# EAGLE board Qwiic_IMU_Bonobo-Panel (EAGLE 7.7.0), part 1 of 8
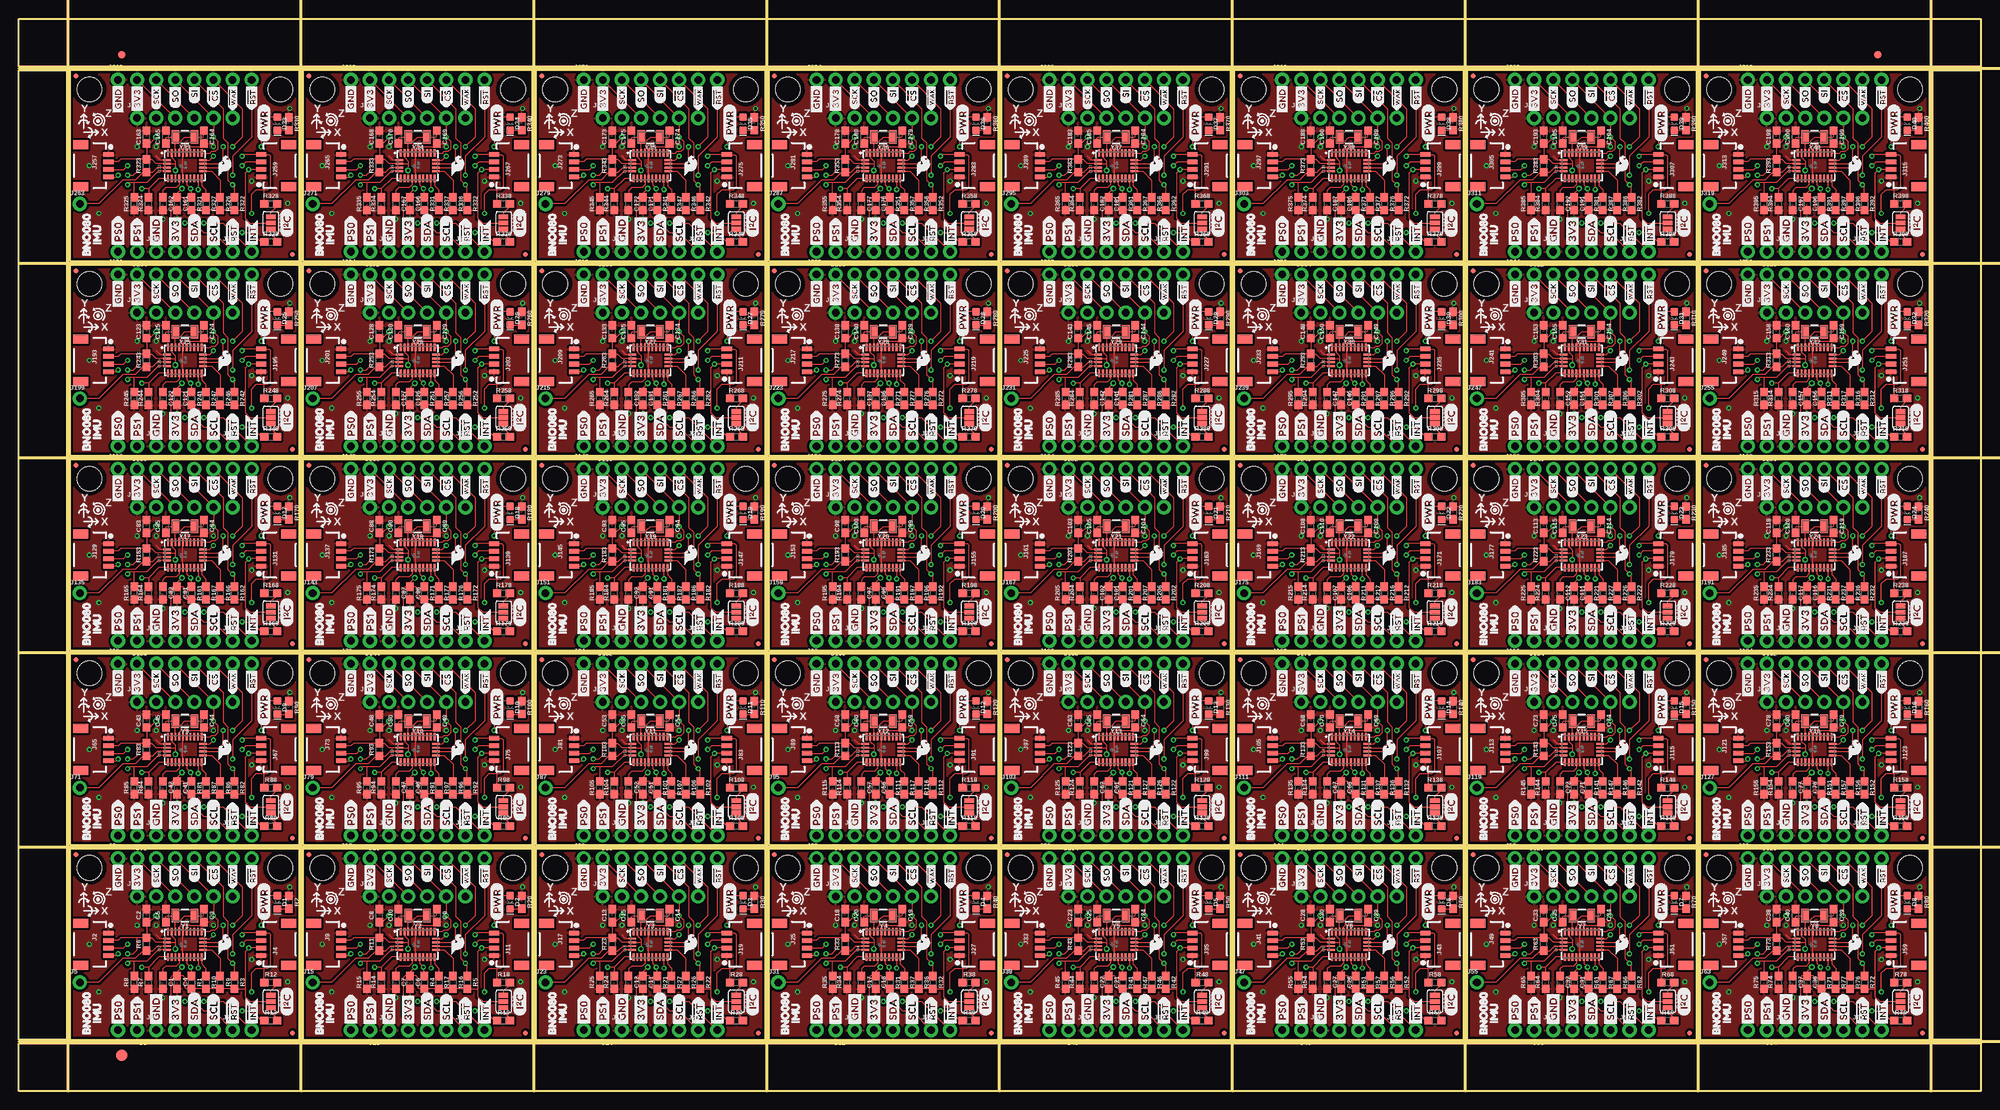
[diagram p0: board, top side]
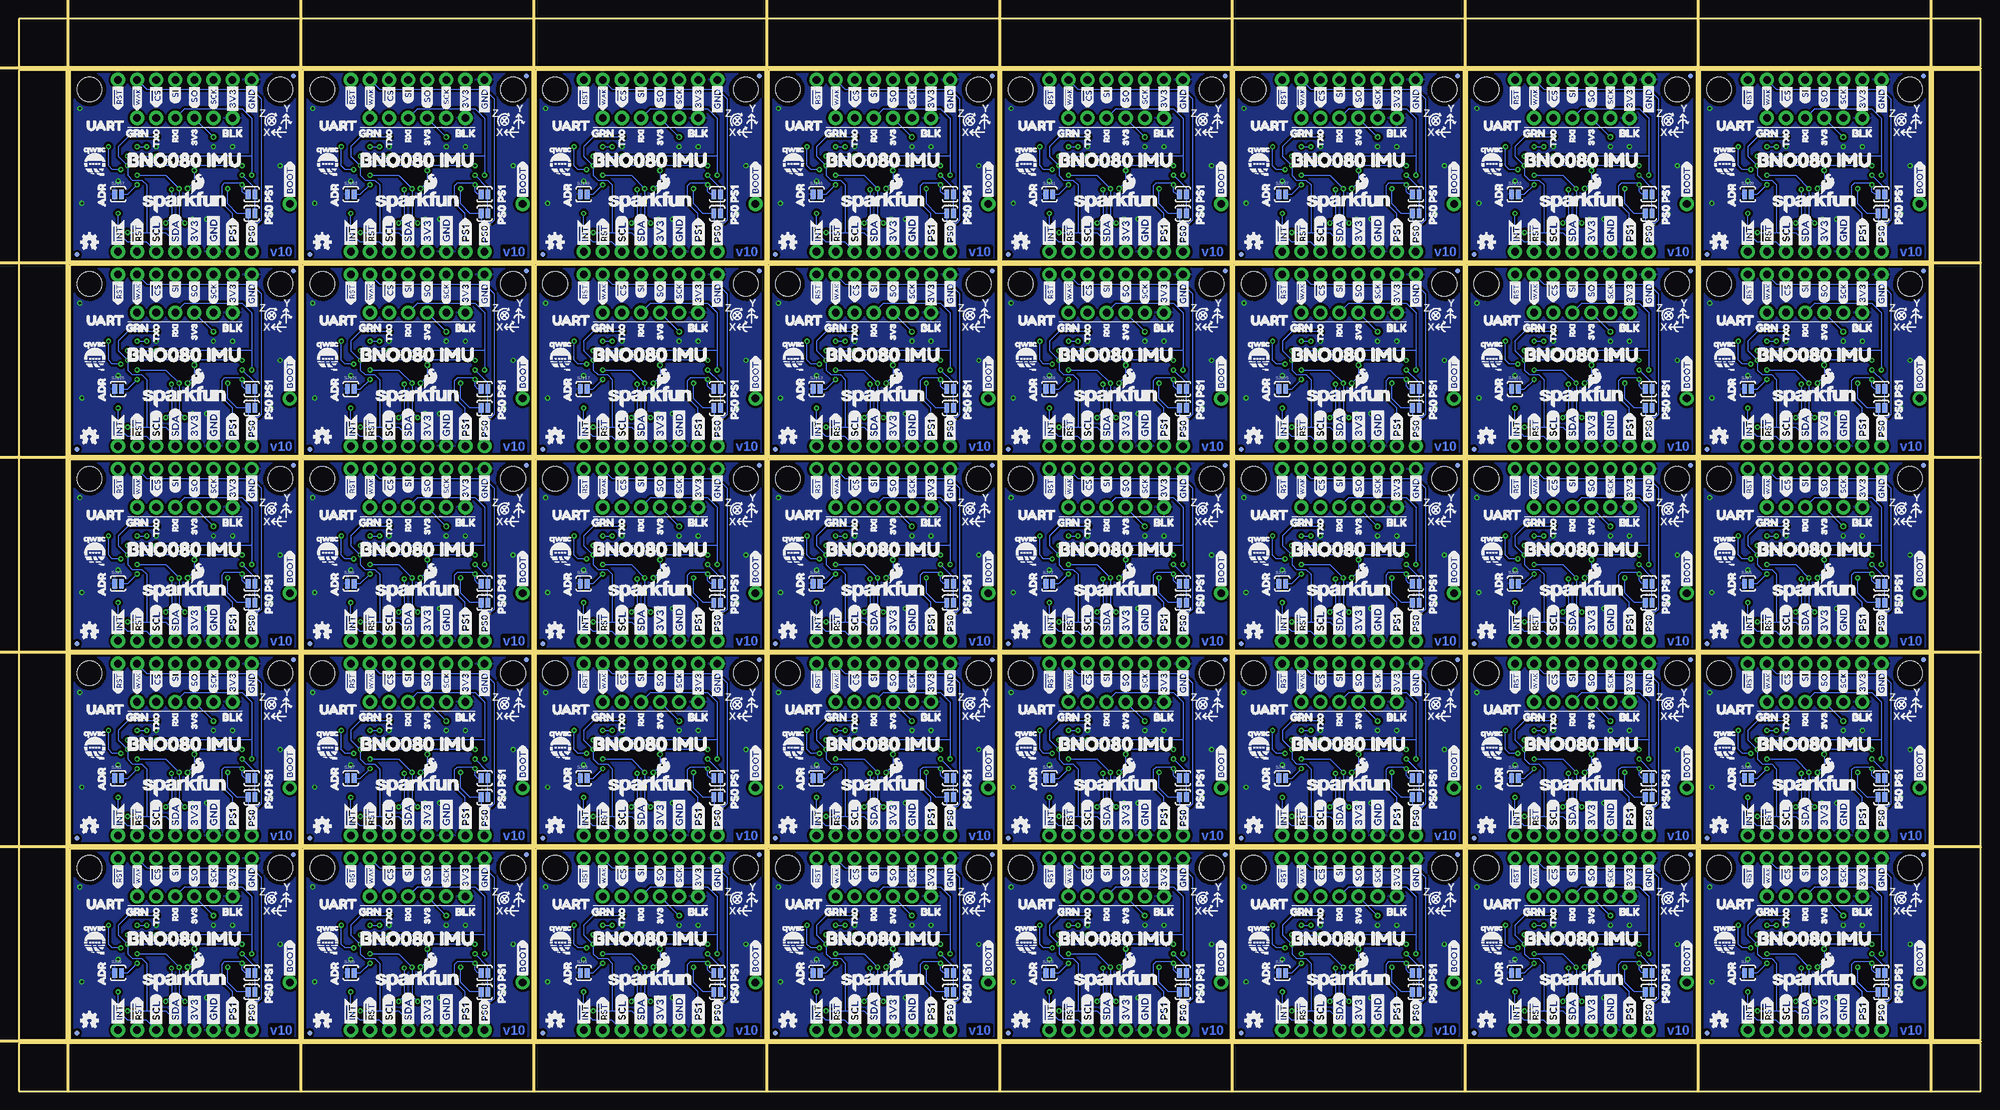
[diagram p1: board, bottom side, seen from below]

Size 261.11 x 142.75 mm. Coordinates in mm from the lower left corner, seen from the top.
Outline: 6.86,6.86 6.86,32.26 37.34,32.26 37.34,6.86 6.86,6.86
Outline: 37.85,6.86 37.85,32.26 68.33,32.26 68.33,6.86 37.85,6.86
Outline: 68.83,6.86 68.83,32.26 99.31,32.26 99.31,6.86 68.83,6.86
Outline: 99.82,6.86 99.82,32.26 130.3,32.26 130.3,6.86 99.82,6.86
Outline: 130.81,6.86 130.81,32.26 161.29,32.26 161.29,6.86 130.81,6.86
Outline: 161.8,6.86 161.8,32.26 192.28,32.26 192.28,6.86 161.8,6.86
Outline: 192.79,6.86 192.79,32.26 223.27,32.26 223.27,6.86 192.79,6.86
Outline: 223.77,6.86 223.77,32.26 254.25,32.26 254.25,6.86 223.77,6.86
Outline: 6.86,32.77 6.86,58.17 37.34,58.17 37.34,32.77 6.86,32.77
Outline: 37.85,32.77 37.85,58.17 68.33,58.17 68.33,32.77 37.85,32.77
Outline: 68.83,32.77 68.83,58.17 99.31,58.17 99.31,32.77 68.83,32.77
Outline: 99.82,32.77 99.82,58.17 130.3,58.17 130.3,32.77 99.82,32.77
Outline: 130.81,32.77 130.81,58.17 161.29,58.17 161.29,32.77 130.81,32.77
Outline: 161.8,32.77 161.8,58.17 192.28,58.17 192.28,32.77 161.8,32.77
Outline: 192.79,32.77 192.79,58.17 223.27,58.17 223.27,32.77 192.79,32.77
Outline: 223.77,32.77 223.77,58.17 254.25,58.17 254.25,32.77 223.77,32.77
Outline: 6.86,58.67 6.86,84.07 37.34,84.07 37.34,58.67 6.86,58.67
Outline: 37.85,58.67 37.85,84.07 68.33,84.07 68.33,58.67 37.85,58.67
Outline: 68.83,58.67 68.83,84.07 99.31,84.07 99.31,58.67 68.83,58.67
Outline: 99.82,58.67 99.82,84.07 130.3,84.07 130.3,58.67 99.82,58.67
Outline: 130.81,58.67 130.81,84.07 161.29,84.07 161.29,58.67 130.81,58.67
Outline: 161.8,58.67 161.8,84.07 192.28,84.07 192.28,58.67 161.8,58.67
Outline: 192.79,58.67 192.79,84.07 223.27,84.07 223.27,58.67 192.79,58.67
Outline: 223.77,58.67 223.77,84.07 254.25,84.07 254.25,58.67 223.77,58.67
Outline: 6.86,84.58 6.86,109.98 37.34,109.98 37.34,84.58 6.86,84.58
Outline: 37.85,84.58 37.85,109.98 68.33,109.98 68.33,84.58 37.85,84.58
Outline: 68.83,84.58 68.83,109.98 99.31,109.98 99.31,84.58 68.83,84.58
Outline: 99.82,84.58 99.82,109.98 130.3,109.98 130.3,84.58 99.82,84.58
Outline: 130.81,84.58 130.81,109.98 161.29,109.98 161.29,84.58 130.81,84.58
Outline: 161.8,84.58 161.8,109.98 192.28,109.98 192.28,84.58 161.8,84.58
Outline: 192.79,84.58 192.79,109.98 223.27,109.98 223.27,84.58 192.79,84.58
Outline: 223.77,84.58 223.77,109.98 254.25,109.98 254.25,84.58 223.77,84.58
Outline: 6.86,110.49 6.86,135.89 37.34,135.89 37.34,110.49 6.86,110.49
Outline: 37.85,110.49 37.85,135.89 68.33,135.89 68.33,110.49 37.85,110.49
Outline: 68.83,110.49 68.83,135.89 99.31,135.89 99.31,110.49 68.83,110.49
Outline: 99.82,110.49 99.82,135.89 130.3,135.89 130.3,110.49 99.82,110.49
Outline: 130.81,110.49 130.81,135.89 161.29,135.89 161.29,110.49 130.81,110.49
Outline: 161.8,110.49 161.8,135.89 192.28,135.89 192.28,110.49 161.8,110.49
Outline: 192.79,110.49 192.79,135.89 223.27,135.89 223.27,110.49 192.79,110.49
Outline: 223.77,110.49 223.77,135.89 254.25,135.89 254.25,110.49 223.77,110.49
Outline: 0,6.35 261.11,6.35 261.11,0 0,0 0,6.35
Outline: 254.76,135.89 261.11,135.89 261.11,6.86 254.76,6.86 254.76,135.89
Outline: 0,142.75 261.11,142.75 261.11,136.4 0,136.4 0,142.75
Outline: 0,135.89 6.35,135.89 6.35,6.86 0,6.86 0,135.89
Copper layers (1*16): Top 0.035mm / dielectric 1.5mm / Bottom 0.035mm
Design rules "SparkFun-2-layer-PCBWay-LIMIT": minimum track width 6mil, minimum drill 0.3mm, track to track 6mil, track to pad 6mil, pad to pad 6mil, via to via 6mil, smd to smd 6mil, copper to edge 6mil, drill to drill 6mil, minimum pad ring 7mil, minimum via ring 7mil, stop-mask expansion 4mil, vias tented up to drill 25mil, thermal gap 10mil
Milling: 15 lines

## Footprints (pad centres in the part's own frame; a part is rotated, then mirrored left to right if it is on the bottom)
0603 = smd 1.1 x 1: 1 -0.85,0; 2 0.85,0
LED-0603 = smd 1 x 1: A -0.877,0; C 0.877,0
FIDUCIAL-1X2 = smd 1 x 1: 1 0,0
FIDUCIAL-1.5X3 = smd 1.5 x 1.5: 1 0,0
1X06_NO_SILK = drill 1.016 pad 1.88: 1 0,0; 2 2.54,0; 3 5.08,0; 4 7.62,0; 5 10.16,0; 6 12.7,0
1X04_1MM_RA = smd 0.6 x 1.35: 1 -1.5,0; 2 -0.5,0; 3 0.5,0; 4 1.5,0 | smd 1.2 x 2: NC1 2.8,-3.675; NC2 -2.8,-3.675
1X04_NO_SILK = drill 1.016 pad 1.88: 1 0,0; 2 2.54,0; 3 5.08,0; 4 7.62,0
1X01_NO_SILK = drill 1.016 pad 1.88: 1 0,0
1X08_NO_SILK = drill 1.016 pad 1.88: 1 0,0; 2 2.54,0; 3 5.08,0; 4 7.62,0; 5 10.16,0; 6 12.7,0; 7 15.24,0; 8 17.78,0
1X02_NO_SILK = drill 1.016 pad 1.88: 1 0,0; 2 2.54,0
MICRO-FIDUCIAL = smd 0.635 x 0.635: 1 0,0
STAND-OFF = hole 3.302: 0,0
SMT-JUMPER_3_2-NC_PASTE_SILK = smd 0.635 x 1.27: 1 -0.813,0; 2 0,0; 3 0.813,0
SJ_2S-NO = smd 0.635 x 1.27: 1 -0.45,0; 2 0.45,0
LGA-28 = smd 1 x 0.25: 1 1.7,2.25; 6 -1.7,2.25; 7 -1.7,1.75; 8 -1.7,1.25; 9 -1.7,0.75; 10 -1.7,0.25; 11 -1.7,-0.25; 12 -1.7,-0.75; 13 -1.7,-1.25; 14 -1.7,-1.75; 15 -1.7,-2.25; 20 1.7,-2.25; 21 1.7,-1.75; 22 1.7,-1.25; 23 1.7,-0.75; 24 1.7,-0.25; 25 1.7,0.25; 26 1.7,0.75; 27 1.7,1.25; 28 1.7,1.75 | smd 0.25 x 1: 2 0.75,2.4; 3 0.25,2.4; 4 -0.25,2.4; 5 -0.75,2.4; 16 -0.75,-2.4; 17 -0.25,-2.4; 18 0.25,-2.4; 19 0.75,-2.4
CRYSTAL-SMD-3.2X1.5MM = smd 1 x 1.8: P$1 -1.25,0; P$2 1.25,0

## Placement (x,y rotation side)
C1  0.1uF  [0603]  19.18,14.48 270 top
C2  0.1uF  [0603]  17.02,23.37 90 top
C3  22pF  [0603]  24.64,23.37 270 top
C4  0.1uF  [0603]  21.08,14.48 270 top
C5  22pF  [0603]  19.56,23.37 90 top
C6  0.1uF  [0603]  52.07,14.48 270 top
C7  0.1uF  [0603]  50.16,14.48 270 top
C8  0.1uF  [0603]  48.01,23.37 90 top
C9  22pF  [0603]  55.63,23.37 270 top
C10  22pF  [0603]  50.55,23.37 90 top
C11  0.1uF  [0603]  83.06,14.48 270 top
C12  0.1uF  [0603]  81.15,14.48 270 top
C13  0.1uF  [0603]  78.99,23.37 90 top
C14  22pF  [0603]  86.61,23.37 270 top
C15  22pF  [0603]  81.53,23.37 90 top
C16  0.1uF  [0603]  114.05,14.48 270 top
C17  0.1uF  [0603]  112.14,14.48 270 top
C18  0.1uF  [0603]  109.98,23.37 90 top
C19  22pF  [0603]  117.6,23.37 270 top
C20  22pF  [0603]  112.52,23.37 90 top
C21  0.1uF  [0603]  145.03,14.48 270 top
C22  0.1uF  [0603]  143.13,14.48 270 top
C23  0.1uF  [0603]  140.97,23.37 90 top
C24  22pF  [0603]  148.59,23.37 270 top
C25  22pF  [0603]  143.51,23.37 90 top
C26  0.1uF  [0603]  176.02,14.48 270 top
C27  0.1uF  [0603]  174.12,14.48 270 top
C28  0.1uF  [0603]  171.96,23.37 90 top
C29  22pF  [0603]  179.58,23.37 270 top
C30  22pF  [0603]  174.5,23.37 90 top
C31  0.1uF  [0603]  207.01,14.48 270 top
C32  0.1uF  [0603]  205.11,14.48 270 top
C33  0.1uF  [0603]  202.95,23.37 90 top
C34  22pF  [0603]  210.57,23.37 270 top
C35  22pF  [0603]  205.49,23.37 90 top
C36  0.1uF  [0603]  238,14.48 270 top
C37  0.1uF  [0603]  236.09,14.48 270 top
C38  0.1uF  [0603]  233.93,23.37 90 top
C39  22pF  [0603]  241.55,23.37 270 top
C40  22pF  [0603]  236.47,23.37 90 top
C41  0.1uF  [0603]  21.08,40.39 270 top
C42  0.1uF  [0603]  19.18,40.39 270 top
C43  0.1uF  [0603]  17.02,49.28 90 top
C44  22pF  [0603]  24.64,49.28 270 top
C45  22pF  [0603]  19.56,49.28 90 top
C46  0.1uF  [0603]  52.07,40.39 270 top
C47  0.1uF  [0603]  50.16,40.39 270 top
C48  0.1uF  [0603]  48.01,49.28 90 top
C49  22pF  [0603]  55.63,49.28 270 top
C50  22pF  [0603]  50.55,49.28 90 top
C51  0.1uF  [0603]  83.06,40.39 270 top
C52  0.1uF  [0603]  81.15,40.39 270 top
C53  0.1uF  [0603]  78.99,49.28 90 top
C54  22pF  [0603]  86.61,49.28 270 top
C55  22pF  [0603]  81.53,49.28 90 top
C56  0.1uF  [0603]  114.05,40.39 270 top
C57  0.1uF  [0603]  112.14,40.39 270 top
C58  0.1uF  [0603]  109.98,49.28 90 top
C59  22pF  [0603]  117.6,49.28 270 top
C60  22pF  [0603]  112.52,49.28 90 top
C61  0.1uF  [0603]  145.03,40.39 270 top
C62  0.1uF  [0603]  143.13,40.39 270 top
C63  0.1uF  [0603]  140.97,49.28 90 top
C64  22pF  [0603]  148.59,49.28 270 top
C65  22pF  [0603]  143.51,49.28 90 top
C66  0.1uF  [0603]  176.02,40.39 270 top
C67  0.1uF  [0603]  174.12,40.39 270 top
C68  0.1uF  [0603]  171.96,49.28 90 top
C69  22pF  [0603]  179.58,49.28 270 top
C70  22pF  [0603]  174.5,49.28 90 top
C71  0.1uF  [0603]  207.01,40.39 270 top
C72  0.1uF  [0603]  205.11,40.39 270 top
C73  0.1uF  [0603]  202.95,49.28 90 top
C74  22pF  [0603]  210.57,49.28 270 top
C75  22pF  [0603]  205.49,49.28 90 top
C76  0.1uF  [0603]  238,40.39 270 top
C77  0.1uF  [0603]  236.09,40.39 270 top
C78  0.1uF  [0603]  233.93,49.28 90 top
C79  22pF  [0603]  241.55,49.28 270 top
C80  22pF  [0603]  236.47,49.28 90 top
C81  0.1uF  [0603]  21.08,66.29 270 top
C82  0.1uF  [0603]  19.18,66.29 270 top
C83  0.1uF  [0603]  17.02,75.18 90 top
C84  22pF  [0603]  24.64,75.18 270 top
C85  22pF  [0603]  19.56,75.18 90 top
C86  0.1uF  [0603]  52.07,66.29 270 top
C87  0.1uF  [0603]  50.16,66.29 270 top
C88  0.1uF  [0603]  48.01,75.18 90 top
C89  22pF  [0603]  55.63,75.18 270 top
C90  22pF  [0603]  50.55,75.18 90 top
C91  0.1uF  [0603]  83.06,66.29 270 top
C92  0.1uF  [0603]  81.15,66.29 270 top
C93  0.1uF  [0603]  78.99,75.18 90 top
C94  22pF  [0603]  86.61,75.18 270 top
C95  22pF  [0603]  81.53,75.18 90 top
C96  0.1uF  [0603]  114.05,66.29 270 top
C97  0.1uF  [0603]  112.14,66.29 270 top
C98  0.1uF  [0603]  109.98,75.18 90 top
C99  22pF  [0603]  117.6,75.18 270 top
C100  22pF  [0603]  112.52,75.18 90 top
C101  0.1uF  [0603]  145.03,66.29 270 top
C102  0.1uF  [0603]  143.13,66.29 270 top
C103  0.1uF  [0603]  140.97,75.18 90 top
C104  22pF  [0603]  148.59,75.18 270 top
C105  22pF  [0603]  143.51,75.18 90 top
C106  0.1uF  [0603]  176.02,66.29 270 top
C107  0.1uF  [0603]  174.12,66.29 270 top
C108  0.1uF  [0603]  171.96,75.18 90 top
C109  22pF  [0603]  179.58,75.18 270 top
C110  22pF  [0603]  174.5,75.18 90 top
C111  0.1uF  [0603]  207.01,66.29 270 top
C112  0.1uF  [0603]  205.11,66.29 270 top
C113  0.1uF  [0603]  202.95,75.18 90 top
C114  22pF  [0603]  210.57,75.18 270 top
C115  22pF  [0603]  205.49,75.18 90 top
C116  0.1uF  [0603]  238,66.29 270 top
C117  0.1uF  [0603]  236.09,66.29 270 top
C118  0.1uF  [0603]  233.93,75.18 90 top
C119  22pF  [0603]  241.55,75.18 270 top
C120  22pF  [0603]  236.47,75.18 90 top
C121  0.1uF  [0603]  21.08,92.2 270 top
C122  0.1uF  [0603]  19.18,92.2 270 top
C123  0.1uF  [0603]  17.02,101.09 90 top
C124  22pF  [0603]  24.64,101.09 270 top
C125  22pF  [0603]  19.56,101.09 90 top
C126  0.1uF  [0603]  52.07,92.2 270 top
C127  0.1uF  [0603]  50.16,92.2 270 top
C128  0.1uF  [0603]  48.01,101.09 90 top
C129  22pF  [0603]  55.63,101.09 270 top
C130  22pF  [0603]  50.55,101.09 90 top
C131  0.1uF  [0603]  83.06,92.2 270 top
C132  0.1uF  [0603]  81.15,92.2 270 top
C133  0.1uF  [0603]  78.99,101.09 90 top
C134  22pF  [0603]  86.61,101.09 270 top
C135  22pF  [0603]  81.53,101.09 90 top
C136  0.1uF  [0603]  114.05,92.2 270 top
C137  0.1uF  [0603]  112.14,92.2 270 top
C138  0.1uF  [0603]  109.98,101.09 90 top
C139  22pF  [0603]  117.6,101.09 270 top
C140  22pF  [0603]  112.52,101.09 90 top
C141  0.1uF  [0603]  145.03,92.2 270 top
C142  0.1uF  [0603]  143.13,92.2 270 top
C143  0.1uF  [0603]  140.97,101.09 90 top
C144  22pF  [0603]  148.59,101.09 270 top
C145  22pF  [0603]  143.51,101.09 90 top
C146  0.1uF  [0603]  176.02,92.2 270 top
C147  0.1uF  [0603]  174.12,92.2 270 top
C148  0.1uF  [0603]  171.96,101.09 90 top
C149  22pF  [0603]  179.58,101.09 270 top
C150  22pF  [0603]  174.5,101.09 90 top
C151  0.1uF  [0603]  207.01,92.2 270 top
C152  0.1uF  [0603]  205.11,92.2 270 top
C153  0.1uF  [0603]  202.95,101.09 90 top
C154  22pF  [0603]  210.57,101.09 270 top
C155  22pF  [0603]  205.49,101.09 90 top
C156  0.1uF  [0603]  238,92.2 270 top
C157  0.1uF  [0603]  236.09,92.2 270 top
C158  0.1uF  [0603]  233.93,101.09 90 top
C159  22pF  [0603]  241.55,101.09 270 top
C160  22pF  [0603]  236.47,101.09 90 top
C161  0.1uF  [0603]  21.08,118.11 270 top
C162  0.1uF  [0603]  19.18,118.11 270 top
C163  0.1uF  [0603]  17.02,127 90 top
C164  22pF  [0603]  24.64,127 270 top
C165  22pF  [0603]  19.56,127 90 top
C166  0.1uF  [0603]  52.07,118.11 270 top
C167  0.1uF  [0603]  50.16,118.11 270 top
C168  0.1uF  [0603]  48.01,127 90 top
C169  22pF  [0603]  55.63,127 270 top
C170  22pF  [0603]  50.55,127 90 top
C171  0.1uF  [0603]  83.06,118.11 270 top
C172  0.1uF  [0603]  81.15,118.11 270 top
C173  0.1uF  [0603]  78.99,127 90 top
C174  22pF  [0603]  86.61,127 270 top
C175  22pF  [0603]  81.53,127 90 top
C176  0.1uF  [0603]  114.05,118.11 270 top
C177  0.1uF  [0603]  112.14,118.11 270 top
C178  0.1uF  [0603]  109.98,127 90 top
C179  22pF  [0603]  117.6,127 270 top
C180  22pF  [0603]  112.52,127 90 top
C181  0.1uF  [0603]  145.03,118.11 270 top
C182  0.1uF  [0603]  143.13,118.11 270 top
C183  0.1uF  [0603]  140.97,127 90 top
C184  22pF  [0603]  148.59,127 270 top
C185  22pF  [0603]  143.51,127 90 top
C186  0.1uF  [0603]  176.02,118.11 270 top
C187  0.1uF  [0603]  174.12,118.11 270 top
C188  0.1uF  [0603]  171.96,127 90 top
C189  22pF  [0603]  179.58,127 270 top
C190  22pF  [0603]  174.5,127 90 top
C191  0.1uF  [0603]  207.01,118.11 270 top
C192  0.1uF  [0603]  205.11,118.11 270 top
C193  0.1uF  [0603]  202.95,127 90 top
C194  22pF  [0603]  210.57,127 270 top
C195  22pF  [0603]  205.49,127 90 top
C196  0.1uF  [0603]  238,118.11 270 top
C197  0.1uF  [0603]  236.09,118.11 270 top
C198  0.1uF  [0603]  233.93,127 90 top
C199  22pF  [0603]  241.55,127 270 top
C200  22pF  [0603]  236.47,127 90 top
D1  RED  [LED-0603]  34.42,25.15 270 top
D2  RED  [LED-0603]  65.41,25.15 270 top
D3  RED  [LED-0603]  96.39,25.15 270 top
D4  RED  [LED-0603]  127.38,25.15 270 top
D5  RED  [LED-0603]  158.37,25.15 270 top
D6  RED  [LED-0603]  189.36,25.15 270 top
D7  RED  [LED-0603]  220.34,25.15 270 top
D8  RED  [LED-0603]  251.33,25.15 270 top
D9  RED  [LED-0603]  34.42,51.05 270 top
D10  RED  [LED-0603]  65.41,51.05 270 top
D11  RED  [LED-0603]  96.39,51.05 270 top
D12  RED  [LED-0603]  127.38,51.05 270 top
D13  RED  [LED-0603]  158.37,51.05 270 top
D14  RED  [LED-0603]  189.36,51.05 270 top
D15  RED  [LED-0603]  220.34,51.05 270 top
D16  RED  [LED-0603]  251.33,51.05 270 top
D17  RED  [LED-0603]  34.42,76.96 270 top
D18  RED  [LED-0603]  65.41,76.96 270 top
D19  RED  [LED-0603]  96.39,76.96 270 top
D20  RED  [LED-0603]  127.38,76.96 270 top
D21  RED  [LED-0603]  158.37,76.96 270 top
D22  RED  [LED-0603]  189.36,76.96 270 top
D23  RED  [LED-0603]  220.34,76.96 270 top
D24  RED  [LED-0603]  251.33,76.96 270 top
D25  RED  [LED-0603]  34.42,102.87 270 top
D26  RED  [LED-0603]  65.41,102.87 270 top
D27  RED  [LED-0603]  96.39,102.87 270 top
D28  RED  [LED-0603]  127.38,102.87 270 top
D29  RED  [LED-0603]  158.37,102.87 270 top
D30  RED  [LED-0603]  189.36,102.87 270 top
D31  RED  [LED-0603]  220.34,102.87 270 top
D32  RED  [LED-0603]  251.33,102.87 270 top
D33  RED  [LED-0603]  34.42,128.78 270 top
D34  RED  [LED-0603]  65.41,128.78 270 top
D35  RED  [LED-0603]  96.39,128.78 270 top
D36  RED  [LED-0603]  127.38,128.78 270 top
D37  RED  [LED-0603]  158.37,128.78 270 top
D38  RED  [LED-0603]  189.36,128.78 270 top
D39  RED  [LED-0603]  220.34,128.78 270 top
D40  RED  [LED-0603]  251.33,128.78 270 top
E$1  [FIDUCIAL-1X2]  13.72,137.99 0 top
E$2  [FIDUCIAL-1X2]  247.4,137.99 0 top
E$3  [FIDUCIAL-1.5X3]  13.72,4.76 0 top
J1  [1X06_NO_SILK]  15.75,25.91 0 top
J2  SMD  [1X04_1MM_RA]  11.94,19.56 270 top
J3  PTH  [1X04_NO_SILK]  18.29,8.13 0 top
J4  SMD  [1X04_1MM_RA]  32.26,19.56 90 top
J5  [1X01_NO_SILK]  8.13,14.48 0 top
J6  SPI  [1X08_NO_SILK]  13.21,30.99 0 top
J7  [1X02_NO_SILK]  28.45,8.13 0 top
J8  [1X02_NO_SILK]  15.75,8.13 180 top
J9  SMD  [1X04_1MM_RA]  42.93,19.56 270 top
J10  PTH  [1X04_NO_SILK]  49.28,8.13 0 top
J11  SMD  [1X04_1MM_RA]  63.25,19.56 90 top
J12  SPI  [1X08_NO_SILK]  44.2,30.99 0 top
J13  [1X02_NO_SILK]  59.44,8.13 0 top
J14  [1X06_NO_SILK]  46.74,25.91 0 top
J15  [1X01_NO_SILK]  39.12,14.48 0 top
J16  [1X02_NO_SILK]  46.74,8.13 180 top
J17  SMD  [1X04_1MM_RA]  73.91,19.56 270 top
J18  PTH  [1X04_NO_SILK]  80.26,8.13 0 top
J19  SMD  [1X04_1MM_RA]  94.23,19.56 90 top
J20  SPI  [1X08_NO_SILK]  75.18,30.99 0 top
J21  [1X02_NO_SILK]  90.42,8.13 0 top
J22  [1X06_NO_SILK]  77.72,25.91 0 top
J23  [1X01_NO_SILK]  70.1,14.48 0 top
J24  [1X02_NO_SILK]  77.72,8.13 180 top
J25  SMD  [1X04_1MM_RA]  104.9,19.56 270 top
J26  PTH  [1X04_NO_SILK]  111.25,8.13 0 top
J27  SMD  [1X04_1MM_RA]  125.22,19.56 90 top
J28  SPI  [1X08_NO_SILK]  106.17,30.99 0 top
J29  [1X02_NO_SILK]  121.41,8.13 0 top
J30  [1X06_NO_SILK]  108.71,25.91 0 top
J31  [1X01_NO_SILK]  101.09,14.48 0 top
J32  [1X02_NO_SILK]  108.71,8.13 180 top
J33  SMD  [1X04_1MM_RA]  135.89,19.56 270 top
J34  PTH  [1X04_NO_SILK]  142.24,8.13 0 top
J35  SMD  [1X04_1MM_RA]  156.21,19.56 90 top
J36  SPI  [1X08_NO_SILK]  137.16,30.99 0 top
J37  [1X02_NO_SILK]  152.4,8.13 0 top
J38  [1X06_NO_SILK]  139.7,25.91 0 top
J39  [1X01_NO_SILK]  132.08,14.48 0 top
J40  [1X02_NO_SILK]  139.7,8.13 180 top
J41  SMD  [1X04_1MM_RA]  166.88,19.56 270 top
J42  PTH  [1X04_NO_SILK]  173.23,8.13 0 top
J43  SMD  [1X04_1MM_RA]  187.2,19.56 90 top
J44  SPI  [1X08_NO_SILK]  168.15,30.99 0 top
J45  [1X02_NO_SILK]  183.39,8.13 0 top
J46  [1X06_NO_SILK]  170.69,25.91 0 top
J47  [1X01_NO_SILK]  163.07,14.48 0 top
J48  [1X02_NO_SILK]  170.69,8.13 180 top
J49  SMD  [1X04_1MM_RA]  197.87,19.56 270 top
J50  PTH  [1X04_NO_SILK]  204.22,8.13 0 top
J51  SMD  [1X04_1MM_RA]  218.19,19.56 90 top
J52  SPI  [1X08_NO_SILK]  199.14,30.99 0 top
J53  [1X02_NO_SILK]  214.38,8.13 0 top
J54  [1X06_NO_SILK]  201.68,25.91 0 top
J55  [1X01_NO_SILK]  194.06,14.48 0 top
J56  [1X02_NO_SILK]  201.68,8.13 180 top
J57  SMD  [1X04_1MM_RA]  228.85,19.56 270 top
J58  PTH  [1X04_NO_SILK]  235.2,8.13 0 top
J59  SMD  [1X04_1MM_RA]  249.17,19.56 90 top
J60  SPI  [1X08_NO_SILK]  230.12,30.99 0 top
J61  [1X02_NO_SILK]  245.36,8.13 0 top
J62  [1X06_NO_SILK]  232.66,25.91 0 top
J63  [1X01_NO_SILK]  225.04,14.48 0 top
J64  [1X02_NO_SILK]  232.66,8.13 180 top
J65  SMD  [1X04_1MM_RA]  11.94,45.47 270 top
J66  PTH  [1X04_NO_SILK]  18.29,34.04 0 top
J67  SMD  [1X04_1MM_RA]  32.26,45.47 90 top
J68  SPI  [1X08_NO_SILK]  13.21,56.9 0 top
J69  [1X02_NO_SILK]  28.45,34.04 0 top
J70  [1X06_NO_SILK]  15.75,51.82 0 top
J71  [1X01_NO_SILK]  8.13,40.39 0 top
J72  [1X02_NO_SILK]  15.75,34.04 180 top
J73  SMD  [1X04_1MM_RA]  42.93,45.47 270 top
J74  PTH  [1X04_NO_SILK]  49.28,34.04 0 top
J75  SMD  [1X04_1MM_RA]  63.25,45.47 90 top
J76  SPI  [1X08_NO_SILK]  44.2,56.9 0 top
J77  [1X02_NO_SILK]  59.44,34.04 0 top
J78  [1X06_NO_SILK]  46.74,51.82 0 top
J79  [1X01_NO_SILK]  39.12,40.39 0 top
J80  [1X02_NO_SILK]  46.74,34.04 180 top
J81  SMD  [1X04_1MM_RA]  73.91,45.47 270 top
J82  PTH  [1X04_NO_SILK]  80.26,34.04 0 top
J83  SMD  [1X04_1MM_RA]  94.23,45.47 90 top
J84  SPI  [1X08_NO_SILK]  75.18,56.9 0 top
J85  [1X02_NO_SILK]  90.42,34.04 0 top
J86  [1X06_NO_SILK]  77.72,51.82 0 top
J87  [1X01_NO_SILK]  70.1,40.39 0 top
J88  [1X02_NO_SILK]  77.72,34.04 180 top
J89  SMD  [1X04_1MM_RA]  104.9,45.47 270 top
J90  PTH  [1X04_NO_SILK]  111.25,34.04 0 top
J91  SMD  [1X04_1MM_RA]  125.22,45.47 90 top
J92  SPI  [1X08_NO_SILK]  106.17,56.9 0 top
J93  [1X02_NO_SILK]  121.41,34.04 0 top
J94  [1X06_NO_SILK]  108.71,51.82 0 top
J95  [1X01_NO_SILK]  101.09,40.39 0 top
J96  [1X02_NO_SILK]  108.71,34.04 180 top
J97  SMD  [1X04_1MM_RA]  135.89,45.47 270 top
J98  PTH  [1X04_NO_SILK]  142.24,34.04 0 top
J99  SMD  [1X04_1MM_RA]  156.21,45.47 90 top
J100  SPI  [1X08_NO_SILK]  137.16,56.9 0 top
J101  [1X02_NO_SILK]  152.4,34.04 0 top
J102  [1X06_NO_SILK]  139.7,51.82 0 top
J103  [1X01_NO_SILK]  132.08,40.39 0 top
J104  [1X02_NO_SILK]  139.7,34.04 180 top
J105  SMD  [1X04_1MM_RA]  166.88,45.47 270 top
J106  PTH  [1X04_NO_SILK]  173.23,34.04 0 top
J107  SMD  [1X04_1MM_RA]  187.2,45.47 90 top
J108  SPI  [1X08_NO_SILK]  168.15,56.9 0 top
J109  [1X02_NO_SILK]  183.39,34.04 0 top
J110  [1X06_NO_SILK]  170.69,51.82 0 top
J111  [1X01_NO_SILK]  163.07,40.39 0 top
J112  [1X02_NO_SILK]  170.69,34.04 180 top
J113  SMD  [1X04_1MM_RA]  197.87,45.47 270 top
J114  PTH  [1X04_NO_SILK]  204.22,34.04 0 top
J115  SMD  [1X04_1MM_RA]  218.19,45.47 90 top
J116  SPI  [1X08_NO_SILK]  199.14,56.9 0 top
J117  [1X02_NO_SILK]  214.38,34.04 0 top
J118  [1X06_NO_SILK]  201.68,51.82 0 top
J119  [1X01_NO_SILK]  194.06,40.39 0 top
J120  [1X02_NO_SILK]  201.68,34.04 180 top
J121  SMD  [1X04_1MM_RA]  228.85,45.47 270 top
J122  PTH  [1X04_NO_SILK]  235.2,34.04 0 top
J123  SMD  [1X04_1MM_RA]  249.17,45.47 90 top
J124  SPI  [1X08_NO_SILK]  230.12,56.9 0 top
J125  [1X02_NO_SILK]  245.36,34.04 0 top
J126  [1X06_NO_SILK]  232.66,51.82 0 top
J127  [1X01_NO_SILK]  225.04,40.39 0 top
J128  [1X02_NO_SILK]  232.66,34.04 180 top
J129  SMD  [1X04_1MM_RA]  11.94,71.37 270 top
J130  PTH  [1X04_NO_SILK]  18.29,59.94 0 top
J131  SMD  [1X04_1MM_RA]  32.26,71.37 90 top
J132  SPI  [1X08_NO_SILK]  13.21,82.8 0 top
J133  [1X02_NO_SILK]  28.45,59.94 0 top
J134  [1X06_NO_SILK]  15.75,77.72 0 top
J135  [1X01_NO_SILK]  8.13,66.29 0 top
J136  [1X02_NO_SILK]  15.75,59.94 180 top
J137  SMD  [1X04_1MM_RA]  42.93,71.37 270 top
J138  PTH  [1X04_NO_SILK]  49.28,59.94 0 top
J139  SMD  [1X04_1MM_RA]  63.25,71.37 90 top
J140  SPI  [1X08_NO_SILK]  44.2,82.8 0 top
J141  [1X02_NO_SILK]  59.44,59.94 0 top
J142  [1X06_NO_SILK]  46.74,77.72 0 top
J143  [1X01_NO_SILK]  39.12,66.29 0 top
J144  [1X02_NO_SILK]  46.74,59.94 180 top
J145  SMD  [1X04_1MM_RA]  73.91,71.37 270 top
J146  PTH  [1X04_NO_SILK]  80.26,59.94 0 top
J147  SMD  [1X04_1MM_RA]  94.23,71.37 90 top
J148  SPI  [1X08_NO_SILK]  75.18,82.8 0 top
J149  [1X02_NO_SILK]  90.42,59.94 0 top
J150  [1X06_NO_SILK]  77.72,77.72 0 top
J151  [1X01_NO_SILK]  70.1,66.29 0 top
J152  [1X02_NO_SILK]  77.72,59.94 180 top
J153  SMD  [1X04_1MM_RA]  104.9,71.37 270 top
J154  PTH  [1X04_NO_SILK]  111.25,59.94 0 top
J155  SMD  [1X04_1MM_RA]  125.22,71.37 90 top
J156  SPI  [1X08_NO_SILK]  106.17,82.8 0 top
J157  [1X02_NO_SILK]  121.41,59.94 0 top
J158  [1X06_NO_SILK]  108.71,77.72 0 top
J159  [1X01_NO_SILK]  101.09,66.29 0 top
J160  [1X02_NO_SILK]  108.71,59.94 180 top
J161  SMD  [1X04_1MM_RA]  135.89,71.37 270 top
J162  PTH  [1X04_NO_SILK]  142.24,59.94 0 top
J163  SMD  [1X04_1MM_RA]  156.21,71.37 90 top
J164  SPI  [1X08_NO_SILK]  137.16,82.8 0 top
J165  [1X02_NO_SILK]  152.4,59.94 0 top
J166  [1X06_NO_SILK]  139.7,77.72 0 top
J167  [1X01_NO_SILK]  132.08,66.29 0 top
J168  [1X02_NO_SILK]  139.7,59.94 180 top
J169  SMD  [1X04_1MM_RA]  166.88,71.37 270 top
J170  PTH  [1X04_NO_SILK]  173.23,59.94 0 top
J171  SMD  [1X04_1MM_RA]  187.2,71.37 90 top
J172  SPI  [1X08_NO_SILK]  168.15,82.8 0 top
J173  [1X02_NO_SILK]  183.39,59.94 0 top
J174  [1X06_NO_SILK]  170.69,77.72 0 top
J175  [1X01_NO_SILK]  163.07,66.29 0 top
J176  [1X02_NO_SILK]  170.69,59.94 180 top
J177  SMD  [1X04_1MM_RA]  197.87,71.37 270 top
J178  PTH  [1X04_NO_SILK]  204.22,59.94 0 top
J179  SMD  [1X04_1MM_RA]  218.19,71.37 90 top
J180  SPI  [1X08_NO_SILK]  199.14,82.8 0 top
J181  [1X02_NO_SILK]  214.38,59.94 0 top
J182  [1X06_NO_SILK]  201.68,77.72 0 top
J183  [1X01_NO_SILK]  194.06,66.29 0 top
J184  [1X02_NO_SILK]  201.68,59.94 180 top
J185  SMD  [1X04_1MM_RA]  228.85,71.37 270 top
J186  PTH  [1X04_NO_SILK]  235.2,59.94 0 top
J187  SMD  [1X04_1MM_RA]  249.17,71.37 90 top
J188  SPI  [1X08_NO_SILK]  230.12,82.8 0 top
J189  [1X02_NO_SILK]  245.36,59.94 0 top
J190  [1X06_NO_SILK]  232.66,77.72 0 top
J191  [1X01_NO_SILK]  225.04,66.29 0 top
J192  [1X02_NO_SILK]  232.66,59.94 180 top
J193  SMD  [1X04_1MM_RA]  11.94,97.28 270 top
J194  PTH  [1X04_NO_SILK]  18.29,85.85 0 top
J195  SMD  [1X04_1MM_RA]  32.26,97.28 90 top
J196  SPI  [1X08_NO_SILK]  13.21,108.71 0 top
J197  [1X02_NO_SILK]  28.45,85.85 0 top
J198  [1X06_NO_SILK]  15.75,103.63 0 top
J199  [1X01_NO_SILK]  8.13,92.2 0 top
J200  [1X02_NO_SILK]  15.75,85.85 180 top
J201  SMD  [1X04_1MM_RA]  42.93,97.28 270 top
J202  PTH  [1X04_NO_SILK]  49.28,85.85 0 top
J203  SMD  [1X04_1MM_RA]  63.25,97.28 90 top
J204  SPI  [1X08_NO_SILK]  44.2,108.71 0 top
J205  [1X02_NO_SILK]  59.44,85.85 0 top
J206  [1X06_NO_SILK]  46.74,103.63 0 top
J207  [1X01_NO_SILK]  39.12,92.2 0 top
J208  [1X02_NO_SILK]  46.74,85.85 180 top
J209  SMD  [1X04_1MM_RA]  73.91,97.28 270 top
J210  PTH  [1X04_NO_SILK]  80.26,85.85 0 top
J211  SMD  [1X04_1MM_RA]  94.23,97.28 90 top
J212  SPI  [1X08_NO_SILK]  75.18,108.71 0 top
J213  [1X02_NO_SILK]  90.42,85.85 0 top
J214  [1X06_NO_SILK]  77.72,103.63 0 top
J215  [1X01_NO_SILK]  70.1,92.2 0 top
J216  [1X02_NO_SILK]  77.72,85.85 180 top
J217  SMD  [1X04_1MM_RA]  104.9,97.28 270 top
J218  PTH  [1X04_NO_SILK]  111.25,85.85 0 top
J219  SMD  [1X04_1MM_RA]  125.22,97.28 90 top
J220  SPI  [1X08_NO_SILK]  106.17,108.71 0 top
J221  [1X02_NO_SILK]  121.41,85.85 0 top
J222  [1X06_NO_SILK]  108.71,103.63 0 top
J223  [1X01_NO_SILK]  101.09,92.2 0 top
J224  [1X02_NO_SILK]  108.71,85.85 180 top
J225  SMD  [1X04_1MM_RA]  135.89,97.28 270 top
J226  PTH  [1X04_NO_SILK]  142.24,85.85 0 top
J227  SMD  [1X04_1MM_RA]  156.21,97.28 90 top
J228  SPI  [1X08_NO_SILK]  137.16,108.71 0 top
J229  [1X02_NO_SILK]  152.4,85.85 0 top
J230  [1X06_NO_SILK]  139.7,103.63 0 top
J231  [1X01_NO_SILK]  132.08,92.2 0 top
J232  [1X02_NO_SILK]  139.7,85.85 180 top
J233  SMD  [1X04_1MM_RA]  166.88,97.28 270 top
J234  PTH  [1X04_NO_SILK]  173.23,85.85 0 top
J235  SMD  [1X04_1MM_RA]  187.2,97.28 90 top
J236  SPI  [1X08_NO_SILK]  168.15,108.71 0 top
J237  [1X02_NO_SILK]  183.39,85.85 0 top
J238  [1X06_NO_SILK]  170.69,103.63 0 top
J239  [1X01_NO_SILK]  163.07,92.2 0 top
J240  [1X02_NO_SILK]  170.69,85.85 180 top
J241  SMD  [1X04_1MM_RA]  197.87,97.28 270 top
J242  PTH  [1X04_NO_SILK]  204.22,85.85 0 top
J243  SMD  [1X04_1MM_RA]  218.19,97.28 90 top
J244  SPI  [1X08_NO_SILK]  199.14,108.71 0 top
J245  [1X02_NO_SILK]  214.38,85.85 0 top
J246  [1X06_NO_SILK]  201.68,103.63 0 top
J247  [1X01_NO_SILK]  194.06,92.2 0 top
J248  [1X02_NO_SILK]  201.68,85.85 180 top
J249  SMD  [1X04_1MM_RA]  228.85,97.28 270 top
J250  PTH  [1X04_NO_SILK]  235.2,85.85 0 top
J251  SMD  [1X04_1MM_RA]  249.17,97.28 90 top
J252  SPI  [1X08_NO_SILK]  230.12,108.71 0 top
J253  [1X02_NO_SILK]  245.36,85.85 0 top
J254  [1X06_NO_SILK]  232.66,103.63 0 top
J255  [1X01_NO_SILK]  225.04,92.2 0 top
J256  [1X02_NO_SILK]  232.66,85.85 180 top
J257  SMD  [1X04_1MM_RA]  11.94,123.19 270 top
J258  PTH  [1X04_NO_SILK]  18.29,111.76 0 top
J259  SMD  [1X04_1MM_RA]  32.26,123.19 90 top
J260  SPI  [1X08_NO_SILK]  13.21,134.62 0 top
J261  [1X02_NO_SILK]  28.45,111.76 0 top
J262  [1X06_NO_SILK]  15.75,129.54 0 top
J263  [1X01_NO_SILK]  8.13,118.11 0 top
J264  [1X02_NO_SILK]  15.75,111.76 180 top
J265  SMD  [1X04_1MM_RA]  42.93,123.19 270 top
J266  PTH  [1X04_NO_SILK]  49.28,111.76 0 top
J267  SMD  [1X04_1MM_RA]  63.25,123.19 90 top
J268  SPI  [1X08_NO_SILK]  44.2,134.62 0 top
J269  [1X02_NO_SILK]  59.44,111.76 0 top
J270  [1X06_NO_SILK]  46.74,129.54 0 top
J271  [1X01_NO_SILK]  39.12,118.11 0 top
J272  [1X02_NO_SILK]  46.74,111.76 180 top
J273  SMD  [1X04_1MM_RA]  73.91,123.19 270 top
J274  PTH  [1X04_NO_SILK]  80.26,111.76 0 top
J275  SMD  [1X04_1MM_RA]  94.23,123.19 90 top
J276  SPI  [1X08_NO_SILK]  75.18,134.62 0 top
J277  [1X02_NO_SILK]  90.42,111.76 0 top
J278  [1X06_NO_SILK]  77.72,129.54 0 top
J279  [1X01_NO_SILK]  70.1,118.11 0 top
J280  [1X02_NO_SILK]  77.72,111.76 180 top
J281  SMD  [1X04_1MM_RA]  104.9,123.19 270 top
J282  PTH  [1X04_NO_SILK]  111.25,111.76 0 top
J283  SMD  [1X04_1MM_RA]  125.22,123.19 90 top
J284  SPI  [1X08_NO_SILK]  106.17,134.62 0 top
J285  [1X02_NO_SILK]  121.41,111.76 0 top
J286  [1X06_NO_SILK]  108.71,129.54 0 top
J287  [1X01_NO_SILK]  101.09,118.11 0 top
J288  [1X02_NO_SILK]  108.71,111.76 180 top
J289  SMD  [1X04_1MM_RA]  135.89,123.19 270 top
J290  PTH  [1X04_NO_SILK]  142.24,111.76 0 top
J291  SMD  [1X04_1MM_RA]  156.21,123.19 90 top
J292  SPI  [1X08_NO_SILK]  137.16,134.62 0 top
J293  [1X02_NO_SILK]  152.4,111.76 0 top
J294  [1X06_NO_SILK]  139.7,129.54 0 top
J295  [1X01_NO_SILK]  132.08,118.11 0 top
J296  [1X02_NO_SILK]  139.7,111.76 180 top
J297  SMD  [1X04_1MM_RA]  166.88,123.19 270 top
J298  PTH  [1X04_NO_SILK]  173.23,111.76 0 top
J299  SMD  [1X04_1MM_RA]  187.2,123.19 90 top
J300  SPI  [1X08_NO_SILK]  168.15,134.62 0 top
J301  [1X02_NO_SILK]  183.39,111.76 0 top
J302  [1X06_NO_SILK]  170.69,129.54 0 top
J303  [1X01_NO_SILK]  163.07,118.11 0 top
J304  [1X02_NO_SILK]  170.69,111.76 180 top
J305  SMD  [1X04_1MM_RA]  197.87,123.19 270 top
J306  PTH  [1X04_NO_SILK]  204.22,111.76 0 top
J307  SMD  [1X04_1MM_RA]  218.19,123.19 90 top
J308  SPI  [1X08_NO_SILK]  199.14,134.62 0 top
J309  [1X02_NO_SILK]  214.38,111.76 0 top
J310  [1X06_NO_SILK]  201.68,129.54 0 top
J311  [1X01_NO_SILK]  194.06,118.11 0 top
J312  [1X02_NO_SILK]  201.68,111.76 180 top
J313  SMD  [1X04_1MM_RA]  228.85,123.19 270 top
J314  PTH  [1X04_NO_SILK]  235.2,111.76 0 top
J315  SMD  [1X04_1MM_RA]  249.17,123.19 90 top
J316  SPI  [1X08_NO_SILK]  230.12,134.62 0 top
J317  [1X02_NO_SILK]  245.36,111.76 0 top
J318  [1X06_NO_SILK]  232.66,129.54 0 top
J319  [1X01_NO_SILK]  225.04,118.11 0 top
J320  [1X02_NO_SILK]  232.66,111.76 180 top
JP1  FIDUCIALUFIDUCIAL  [MICRO-FIDUCIAL]  36.45,7.75 0 bottom
JP2  FIDUCIALUFIDUCIAL  [MICRO-FIDUCIAL]  36.45,7.75 0 top
JP3  STAND-OFF  [STAND-OFF]  9.4,29.72 0 top
JP4  STAND-OFF  [STAND-OFF]  34.8,29.72 0 top
JP5  FIDUCIALUFIDUCIAL  [MICRO-FIDUCIAL]  7.62,31.5 0 bottom
JP6  FIDUCIALUFIDUCIAL  [MICRO-FIDUCIAL]  7.62,31.5 0 top
JP7  STAND-OFF  [STAND-OFF]  40.39,29.72 0 top
JP8  STAND-OFF  [STAND-OFF]  65.79,29.72 0 top
JP9  FIDUCIALUFIDUCIAL  [MICRO-FIDUCIAL]  67.44,7.75 0 top
JP10  FIDUCIALUFIDUCIAL  [MICRO-FIDUCIAL]  38.61,31.5 0 top
JP11  FIDUCIALUFIDUCIAL  [MICRO-FIDUCIAL]  67.44,7.75 0 bottom
JP12  FIDUCIALUFIDUCIAL  [MICRO-FIDUCIAL]  38.61,31.5 0 bottom
JP13  STAND-OFF  [STAND-OFF]  71.37,29.72 0 top
JP14  STAND-OFF  [STAND-OFF]  96.77,29.72 0 top
JP15  FIDUCIALUFIDUCIAL  [MICRO-FIDUCIAL]  98.42,7.75 0 top
JP16  FIDUCIALUFIDUCIAL  [MICRO-FIDUCIAL]  69.6,31.5 0 top
JP17  FIDUCIALUFIDUCIAL  [MICRO-FIDUCIAL]  98.42,7.75 0 bottom
JP18  FIDUCIALUFIDUCIAL  [MICRO-FIDUCIAL]  69.6,31.5 0 bottom
JP19  STAND-OFF  [STAND-OFF]  102.36,29.72 0 top
JP20  STAND-OFF  [STAND-OFF]  127.76,29.72 0 top
JP21  FIDUCIALUFIDUCIAL  [MICRO-FIDUCIAL]  129.41,7.75 0 top
JP22  FIDUCIALUFIDUCIAL  [MICRO-FIDUCIAL]  100.58,31.5 0 top
JP23  FIDUCIALUFIDUCIAL  [MICRO-FIDUCIAL]  129.41,7.75 0 bottom
JP24  FIDUCIALUFIDUCIAL  [MICRO-FIDUCIAL]  100.58,31.5 0 bottom
JP25  STAND-OFF  [STAND-OFF]  133.35,29.72 0 top
JP26  STAND-OFF  [STAND-OFF]  158.75,29.72 0 top
JP27  FIDUCIALUFIDUCIAL  [MICRO-FIDUCIAL]  160.4,7.75 0 top
JP28  FIDUCIALUFIDUCIAL  [MICRO-FIDUCIAL]  131.57,31.5 0 top
JP29  FIDUCIALUFIDUCIAL  [MICRO-FIDUCIAL]  160.4,7.75 0 bottom
JP30  FIDUCIALUFIDUCIAL  [MICRO-FIDUCIAL]  131.57,31.5 0 bottom
JP31  STAND-OFF  [STAND-OFF]  164.34,29.72 0 top
JP32  STAND-OFF  [STAND-OFF]  189.74,29.72 0 top
JP33  FIDUCIALUFIDUCIAL  [MICRO-FIDUCIAL]  191.39,7.75 0 top
JP34  FIDUCIALUFIDUCIAL  [MICRO-FIDUCIAL]  162.56,31.5 0 top
JP35  FIDUCIALUFIDUCIAL  [MICRO-FIDUCIAL]  191.39,7.75 0 bottom
JP36  FIDUCIALUFIDUCIAL  [MICRO-FIDUCIAL]  162.56,31.5 0 bottom
JP37  STAND-OFF  [STAND-OFF]  195.33,29.72 0 top
JP38  STAND-OFF  [STAND-OFF]  220.73,29.72 0 top
JP39  FIDUCIALUFIDUCIAL  [MICRO-FIDUCIAL]  222.38,7.75 0 top
JP40  FIDUCIALUFIDUCIAL  [MICRO-FIDUCIAL]  193.55,31.5 0 top
JP41  FIDUCIALUFIDUCIAL  [MICRO-FIDUCIAL]  222.38,7.75 0 bottom
JP42  FIDUCIALUFIDUCIAL  [MICRO-FIDUCIAL]  193.55,31.5 0 bottom
JP43  STAND-OFF  [STAND-OFF]  226.31,29.72 0 top
JP44  STAND-OFF  [STAND-OFF]  251.71,29.72 0 top
JP45  FIDUCIALUFIDUCIAL  [MICRO-FIDUCIAL]  253.37,7.75 0 top
JP46  FIDUCIALUFIDUCIAL  [MICRO-FIDUCIAL]  224.54,31.5 0 top
JP47  FIDUCIALUFIDUCIAL  [MICRO-FIDUCIAL]  253.37,7.75 0 bottom
JP48  FIDUCIALUFIDUCIAL  [MICRO-FIDUCIAL]  224.54,31.5 0 bottom
JP49  STAND-OFF  [STAND-OFF]  9.4,55.63 0 top
JP50  STAND-OFF  [STAND-OFF]  34.8,55.63 0 top
JP51  FIDUCIALUFIDUCIAL  [MICRO-FIDUCIAL]  36.45,33.66 0 top
JP52  FIDUCIALUFIDUCIAL  [MICRO-FIDUCIAL]  7.62,57.4 0 top
JP53  FIDUCIALUFIDUCIAL  [MICRO-FIDUCIAL]  36.45,33.66 0 bottom
JP54  FIDUCIALUFIDUCIAL  [MICRO-FIDUCIAL]  7.62,57.4 0 bottom
JP55  STAND-OFF  [STAND-OFF]  40.39,55.63 0 top
JP56  STAND-OFF  [STAND-OFF]  65.79,55.63 0 top
JP57  FIDUCIALUFIDUCIAL  [MICRO-FIDUCIAL]  67.44,33.66 0 top
JP58  FIDUCIALUFIDUCIAL  [MICRO-FIDUCIAL]  38.61,57.4 0 top
JP59  FIDUCIALUFIDUCIAL  [MICRO-FIDUCIAL]  67.44,33.66 0 bottom
JP60  FIDUCIALUFIDUCIAL  [MICRO-FIDUCIAL]  38.61,57.4 0 bottom
JP61  STAND-OFF  [STAND-OFF]  71.37,55.63 0 top
JP62  STAND-OFF  [STAND-OFF]  96.77,55.63 0 top
JP63  FIDUCIALUFIDUCIAL  [MICRO-FIDUCIAL]  98.42,33.66 0 top
JP64  FIDUCIALUFIDUCIAL  [MICRO-FIDUCIAL]  69.6,57.4 0 top
JP65  FIDUCIALUFIDUCIAL  [MICRO-FIDUCIAL]  98.42,33.66 0 bottom
JP66  FIDUCIALUFIDUCIAL  [MICRO-FIDUCIAL]  69.6,57.4 0 bottom
JP67  STAND-OFF  [STAND-OFF]  102.36,55.63 0 top
JP68  STAND-OFF  [STAND-OFF]  127.76,55.63 0 top
JP69  FIDUCIALUFIDUCIAL  [MICRO-FIDUCIAL]  129.41,33.66 0 top
JP70  FIDUCIALUFIDUCIAL  [MICRO-FIDUCIAL]  100.58,57.4 0 top
JP71  FIDUCIALUFIDUCIAL  [MICRO-FIDUCIAL]  129.41,33.66 0 bottom
JP72  FIDUCIALUFIDUCIAL  [MICRO-FIDUCIAL]  100.58,57.4 0 bottom
JP73  STAND-OFF  [STAND-OFF]  133.35,55.63 0 top
JP74  STAND-OFF  [STAND-OFF]  158.75,55.63 0 top
JP75  FIDUCIALUFIDUCIAL  [MICRO-FIDUCIAL]  160.4,33.66 0 top
JP76  FIDUCIALUFIDUCIAL  [MICRO-FIDUCIAL]  131.57,57.4 0 top
JP77  FIDUCIALUFIDUCIAL  [MICRO-FIDUCIAL]  160.4,33.66 0 bottom
JP78  FIDUCIALUFIDUCIAL  [MICRO-FIDUCIAL]  131.57,57.4 0 bottom
JP79  STAND-OFF  [STAND-OFF]  164.34,55.63 0 top
JP80  STAND-OFF  [STAND-OFF]  189.74,55.63 0 top
JP81  FIDUCIALUFIDUCIAL  [MICRO-FIDUCIAL]  191.39,33.66 0 top
JP82  FIDUCIALUFIDUCIAL  [MICRO-FIDUCIAL]  162.56,57.4 0 top
JP83  FIDUCIALUFIDUCIAL  [MICRO-FIDUCIAL]  191.39,33.66 0 bottom
JP84  FIDUCIALUFIDUCIAL  [MICRO-FIDUCIAL]  162.56,57.4 0 bottom
JP85  STAND-OFF  [STAND-OFF]  195.33,55.63 0 top
JP86  STAND-OFF  [STAND-OFF]  220.73,55.63 0 top
JP87  FIDUCIALUFIDUCIAL  [MICRO-FIDUCIAL]  222.38,33.66 0 top
JP88  FIDUCIALUFIDUCIAL  [MICRO-FIDUCIAL]  193.55,57.4 0 top
JP89  FIDUCIALUFIDUCIAL  [MICRO-FIDUCIAL]  222.38,33.66 0 bottom
JP90  FIDUCIALUFIDUCIAL  [MICRO-FIDUCIAL]  193.55,57.4 0 bottom
JP91  STAND-OFF  [STAND-OFF]  226.31,55.63 0 top
JP92  STAND-OFF  [STAND-OFF]  251.71,55.63 0 top
JP93  FIDUCIALUFIDUCIAL  [MICRO-FIDUCIAL]  253.37,33.66 0 top
JP94  FIDUCIALUFIDUCIAL  [MICRO-FIDUCIAL]  224.54,57.4 0 top
JP95  FIDUCIALUFIDUCIAL  [MICRO-FIDUCIAL]  253.37,33.66 0 bottom
JP96  FIDUCIALUFIDUCIAL  [MICRO-FIDUCIAL]  224.54,57.4 0 bottom
JP97  STAND-OFF  [STAND-OFF]  9.4,81.53 0 top
JP98  STAND-OFF  [STAND-OFF]  34.8,81.53 0 top
JP99  FIDUCIALUFIDUCIAL  [MICRO-FIDUCIAL]  36.45,59.56 0 top
JP100  FIDUCIALUFIDUCIAL  [MICRO-FIDUCIAL]  7.62,83.31 0 top
JP101  FIDUCIALUFIDUCIAL  [MICRO-FIDUCIAL]  36.45,59.56 0 bottom
JP102  FIDUCIALUFIDUCIAL  [MICRO-FIDUCIAL]  7.62,83.31 0 bottom
JP103  STAND-OFF  [STAND-OFF]  40.39,81.53 0 top
JP104  STAND-OFF  [STAND-OFF]  65.79,81.53 0 top
JP105  FIDUCIALUFIDUCIAL  [MICRO-FIDUCIAL]  67.44,59.56 0 top
JP106  FIDUCIALUFIDUCIAL  [MICRO-FIDUCIAL]  38.61,83.31 0 top
JP107  FIDUCIALUFIDUCIAL  [MICRO-FIDUCIAL]  67.44,59.56 0 bottom
JP108  FIDUCIALUFIDUCIAL  [MICRO-FIDUCIAL]  38.61,83.31 0 bottom
JP109  STAND-OFF  [STAND-OFF]  71.37,81.53 0 top
JP110  STAND-OFF  [STAND-OFF]  96.77,81.53 0 top
JP111  FIDUCIALUFIDUCIAL  [MICRO-FIDUCIAL]  98.42,59.56 0 top
JP112  FIDUCIALUFIDUCIAL  [MICRO-FIDUCIAL]  69.6,83.31 0 top
JP113  FIDUCIALUFIDUCIAL  [MICRO-FIDUCIAL]  98.42,59.56 0 bottom
JP114  FIDUCIALUFIDUCIAL  [MICRO-FIDUCIAL]  69.6,83.31 0 bottom
JP115  STAND-OFF  [STAND-OFF]  102.36,81.53 0 top
JP116  STAND-OFF  [STAND-OFF]  127.76,81.53 0 top
JP117  FIDUCIALUFIDUCIAL  [MICRO-FIDUCIAL]  129.41,59.56 0 top
JP118  FIDUCIALUFIDUCIAL  [MICRO-FIDUCIAL]  100.58,83.31 0 top
JP119  FIDUCIALUFIDUCIAL  [MICRO-FIDUCIAL]  129.41,59.56 0 bottom
JP120  FIDUCIALUFIDUCIAL  [MICRO-FIDUCIAL]  100.58,83.31 0 bottom
JP121  STAND-OFF  [STAND-OFF]  133.35,81.53 0 top
JP122  STAND-OFF  [STAND-OFF]  158.75,81.53 0 top
JP123  FIDUCIALUFIDUCIAL  [MICRO-FIDUCIAL]  160.4,59.56 0 top
JP124  FIDUCIALUFIDUCIAL  [MICRO-FIDUCIAL]  131.57,83.31 0 top
JP125  FIDUCIALUFIDUCIAL  [MICRO-FIDUCIAL]  160.4,59.56 0 bottom
JP126  FIDUCIALUFIDUCIAL  [MICRO-FIDUCIAL]  131.57,83.31 0 bottom
JP127  STAND-OFF  [STAND-OFF]  164.34,81.53 0 top
JP128  STAND-OFF  [STAND-OFF]  189.74,81.53 0 top
JP129  FIDUCIALUFIDUCIAL  [MICRO-FIDUCIAL]  191.39,59.56 0 top
JP130  FIDUCIALUFIDUCIAL  [MICRO-FIDUCIAL]  162.56,83.31 0 top
JP131  FIDUCIALUFIDUCIAL  [MICRO-FIDUCIAL]  191.39,59.56 0 bottom
JP132  FIDUCIALUFIDUCIAL  [MICRO-FIDUCIAL]  162.56,83.31 0 bottom
JP133  STAND-OFF  [STAND-OFF]  195.33,81.53 0 top
JP134  STAND-OFF  [STAND-OFF]  220.73,81.53 0 top
JP135  FIDUCIALUFIDUCIAL  [MICRO-FIDUCIAL]  222.38,59.56 0 top
JP136  FIDUCIALUFIDUCIAL  [MICRO-FIDUCIAL]  193.55,83.31 0 top
JP137  FIDUCIALUFIDUCIAL  [MICRO-FIDUCIAL]  222.38,59.56 0 bottom
JP138  FIDUCIALUFIDUCIAL  [MICRO-FIDUCIAL]  193.55,83.31 0 bottom
JP139  STAND-OFF  [STAND-OFF]  226.31,81.53 0 top
JP140  STAND-OFF  [STAND-OFF]  251.71,81.53 0 top
JP141  FIDUCIALUFIDUCIAL  [MICRO-FIDUCIAL]  253.37,59.56 0 top
JP142  FIDUCIALUFIDUCIAL  [MICRO-FIDUCIAL]  224.54,83.31 0 top
JP143  FIDUCIALUFIDUCIAL  [MICRO-FIDUCIAL]  253.37,59.56 0 bottom
JP144  FIDUCIALUFIDUCIAL  [MICRO-FIDUCIAL]  224.54,83.31 0 bottom
JP145  STAND-OFF  [STAND-OFF]  9.4,107.44 0 top
JP146  STAND-OFF  [STAND-OFF]  34.8,107.44 0 top
JP147  FIDUCIALUFIDUCIAL  [MICRO-FIDUCIAL]  36.45,85.47 0 top
JP148  FIDUCIALUFIDUCIAL  [MICRO-FIDUCIAL]  7.62,109.22 0 top
JP149  FIDUCIALUFIDUCIAL  [MICRO-FIDUCIAL]  36.45,85.47 0 bottom
JP150  FIDUCIALUFIDUCIAL  [MICRO-FIDUCIAL]  7.62,109.22 0 bottom
JP151  STAND-OFF  [STAND-OFF]  40.39,107.44 0 top
JP152  STAND-OFF  [STAND-OFF]  65.79,107.44 0 top
JP153  FIDUCIALUFIDUCIAL  [MICRO-FIDUCIAL]  67.44,85.47 0 top
JP154  FIDUCIALUFIDUCIAL  [MICRO-FIDUCIAL]  38.61,109.22 0 top
JP155  FIDUCIALUFIDUCIAL  [MICRO-FIDUCIAL]  67.44,85.47 0 bottom
JP156  FIDUCIALUFIDUCIAL  [MICRO-FIDUCIAL]  38.61,109.22 0 bottom
JP157  STAND-OFF  [STAND-OFF]  71.37,107.44 0 top
JP158  STAND-OFF  [STAND-OFF]  96.77,107.44 0 top
JP159  FIDUCIALUFIDUCIAL  [MICRO-FIDUCIAL]  98.42,85.47 0 top
JP160  FIDUCIALUFIDUCIAL  [MICRO-FIDUCIAL]  69.6,109.22 0 top
JP161  FIDUCIALUFIDUCIAL  [MICRO-FIDUCIAL]  98.42,85.47 0 bottom
JP162  FIDUCIALUFIDUCIAL  [MICRO-FIDUCIAL]  69.6,109.22 0 bottom
JP163  STAND-OFF  [STAND-OFF]  102.36,107.44 0 top
JP164  STAND-OFF  [STAND-OFF]  127.76,107.44 0 top
JP165  FIDUCIALUFIDUCIAL  [MICRO-FIDUCIAL]  129.41,85.47 0 top
JP166  FIDUCIALUFIDUCIAL  [MICRO-FIDUCIAL]  100.58,109.22 0 top
JP167  FIDUCIALUFIDUCIAL  [MICRO-FIDUCIAL]  129.41,85.47 0 bottom
JP168  FIDUCIALUFIDUCIAL  [MICRO-FIDUCIAL]  100.58,109.22 0 bottom
JP169  STAND-OFF  [STAND-OFF]  133.35,107.44 0 top
JP170  STAND-OFF  [STAND-OFF]  158.75,107.44 0 top
JP171  FIDUCIALUFIDUCIAL  [MICRO-FIDUCIAL]  160.4,85.47 0 top
JP172  FIDUCIALUFIDUCIAL  [MICRO-FIDUCIAL]  131.57,109.22 0 top
JP173  FIDUCIALUFIDUCIAL  [MICRO-FIDUCIAL]  160.4,85.47 0 bottom
JP174  FIDUCIALUFIDUCIAL  [MICRO-FIDUCIAL]  131.57,109.22 0 bottom
JP175  STAND-OFF  [STAND-OFF]  164.34,107.44 0 top
JP176  STAND-OFF  [STAND-OFF]  189.74,107.44 0 top
JP177  FIDUCIALUFIDUCIAL  [MICRO-FIDUCIAL]  191.39,85.47 0 top
JP178  FIDUCIALUFIDUCIAL  [MICRO-FIDUCIAL]  162.56,109.22 0 top
JP179  FIDUCIALUFIDUCIAL  [MICRO-FIDUCIAL]  191.39,85.47 0 bottom
JP180  FIDUCIALUFIDUCIAL  [MICRO-FIDUCIAL]  162.56,109.22 0 bottom
JP181  STAND-OFF  [STAND-OFF]  195.33,107.44 0 top
JP182  STAND-OFF  [STAND-OFF]  220.73,107.44 0 top
JP183  FIDUCIALUFIDUCIAL  [MICRO-FIDUCIAL]  222.38,85.47 0 top
JP184  FIDUCIALUFIDUCIAL  [MICRO-FIDUCIAL]  193.55,109.22 0 top
JP185  FIDUCIALUFIDUCIAL  [MICRO-FIDUCIAL]  222.38,85.47 0 bottom
JP186  FIDUCIALUFIDUCIAL  [MICRO-FIDUCIAL]  193.55,109.22 0 bottom
JP187  STAND-OFF  [STAND-OFF]  226.31,107.44 0 top
JP188  STAND-OFF  [STAND-OFF]  251.71,107.44 0 top
JP189  FIDUCIALUFIDUCIAL  [MICRO-FIDUCIAL]  253.37,85.47 0 top
JP190  FIDUCIALUFIDUCIAL  [MICRO-FIDUCIAL]  224.54,109.22 0 top
JP191  FIDUCIALUFIDUCIAL  [MICRO-FIDUCIAL]  253.37,85.47 0 bottom
JP192  FIDUCIALUFIDUCIAL  [MICRO-FIDUCIAL]  224.54,109.22 0 bottom
JP193  STAND-OFF  [STAND-OFF]  9.4,133.35 0 top
JP194  STAND-OFF  [STAND-OFF]  34.8,133.35 0 top
JP195  FIDUCIALUFIDUCIAL  [MICRO-FIDUCIAL]  36.45,111.38 0 top
JP196  FIDUCIALUFIDUCIAL  [MICRO-FIDUCIAL]  7.62,135.13 0 top
JP197  FIDUCIALUFIDUCIAL  [MICRO-FIDUCIAL]  36.45,111.38 0 bottom
JP198  FIDUCIALUFIDUCIAL  [MICRO-FIDUCIAL]  7.62,135.13 0 bottom
JP199  STAND-OFF  [STAND-OFF]  40.39,133.35 0 top
JP200  STAND-OFF  [STAND-OFF]  65.79,133.35 0 top
JP201  FIDUCIALUFIDUCIAL  [MICRO-FIDUCIAL]  67.44,111.38 0 top
JP202  FIDUCIALUFIDUCIAL  [MICRO-FIDUCIAL]  38.61,135.13 0 top
JP203  FIDUCIALUFIDUCIAL  [MICRO-FIDUCIAL]  67.44,111.38 0 bottom
JP204  FIDUCIALUFIDUCIAL  [MICRO-FIDUCIAL]  38.61,135.13 0 bottom
JP205  STAND-OFF  [STAND-OFF]  71.37,133.35 0 top
JP206  STAND-OFF  [STAND-OFF]  96.77,133.35 0 top
JP207  FIDUCIALUFIDUCIAL  [MICRO-FIDUCIAL]  98.42,111.38 0 top
JP208  FIDUCIALUFIDUCIAL  [MICRO-FIDUCIAL]  69.6,135.13 0 top
JP209  FIDUCIALUFIDUCIAL  [MICRO-FIDUCIAL]  98.42,111.38 0 bottom
JP210  FIDUCIALUFIDUCIAL  [MICRO-FIDUCIAL]  69.6,135.13 0 bottom
JP211  STAND-OFF  [STAND-OFF]  102.36,133.35 0 top
JP212  STAND-OFF  [STAND-OFF]  127.76,133.35 0 top
JP213  FIDUCIALUFIDUCIAL  [MICRO-FIDUCIAL]  129.41,111.38 0 top
JP214  FIDUCIALUFIDUCIAL  [MICRO-FIDUCIAL]  100.58,135.13 0 top
JP215  FIDUCIALUFIDUCIAL  [MICRO-FIDUCIAL]  129.41,111.38 0 bottom
JP216  FIDUCIALUFIDUCIAL  [MICRO-FIDUCIAL]  100.58,135.13 0 bottom
JP217  STAND-OFF  [STAND-OFF]  133.35,133.35 0 top
JP218  STAND-OFF  [STAND-OFF]  158.75,133.35 0 top
JP219  FIDUCIALUFIDUCIAL  [MICRO-FIDUCIAL]  160.4,111.38 0 top
JP220  FIDUCIALUFIDUCIAL  [MICRO-FIDUCIAL]  131.57,135.13 0 top
JP221  FIDUCIALUFIDUCIAL  [MICRO-FIDUCIAL]  160.4,111.38 0 bottom
JP222  FIDUCIALUFIDUCIAL  [MICRO-FIDUCIAL]  131.57,135.13 0 bottom
JP223  STAND-OFF  [STAND-OFF]  164.34,133.35 0 top
JP224  STAND-OFF  [STAND-OFF]  189.74,133.35 0 top
JP225  FIDUCIALUFIDUCIAL  [MICRO-FIDUCIAL]  191.39,111.38 0 top
JP226  FIDUCIALUFIDUCIAL  [MICRO-FIDUCIAL]  162.56,135.13 0 top
JP227  FIDUCIALUFIDUCIAL  [MICRO-FIDUCIAL]  191.39,111.38 0 bottom
JP228  FIDUCIALUFIDUCIAL  [MICRO-FIDUCIAL]  162.56,135.13 0 bottom
JP229  STAND-OFF  [STAND-OFF]  195.33,133.35 0 top
JP230  STAND-OFF  [STAND-OFF]  220.73,133.35 0 top
JP231  FIDUCIALUFIDUCIAL  [MICRO-FIDUCIAL]  222.38,111.38 0 top
JP232  FIDUCIALUFIDUCIAL  [MICRO-FIDUCIAL]  193.55,135.13 0 top
JP233  FIDUCIALUFIDUCIAL  [MICRO-FIDUCIAL]  222.38,111.38 0 bottom
JP234  FIDUCIALUFIDUCIAL  [MICRO-FIDUCIAL]  193.55,135.13 0 bottom
JP235  STAND-OFF  [STAND-OFF]  226.31,133.35 0 top
JP236  STAND-OFF  [STAND-OFF]  251.71,133.35 0 top
JP237  FIDUCIALUFIDUCIAL  [MICRO-FIDUCIAL]  253.37,111.38 0 top
JP238  FIDUCIALUFIDUCIAL  [MICRO-FIDUCIAL]  224.54,135.13 0 top
JP239  FIDUCIALUFIDUCIAL  [MICRO-FIDUCIAL]  253.37,111.38 0 bottom
JP240  FIDUCIALUFIDUCIAL  [MICRO-FIDUCIAL]  224.54,135.13 0 bottom
LOGO1  OSHW-LOGOMINI  [OSHW-LOGO-MINI]  34.8,9.4 0 bottom
LOGO2  OSHW-LOGOMINI  [OSHW-LOGO-MINI]  65.79,9.4 0 bottom
LOGO3  SFE_LOGO_FLAME.1_INCH  [SFE_LOGO_FLAME_.1]  57.28,17.91 0 top
LOGO4  SFE_LOGO_FLAME.1_INCH  [SFE_LOGO_FLAME_.1]  26.29,17.91 0 top
LOGO5  SFE_LOGO_NAME_FLAME.1_INCH  [SFE_LOGO_NAME_FLAME_.1]  28.07,13.21 0 bottom
LOGO6  SFE_LOGO_NAME_FLAME.1_INCH  [SFE_LOGO_NAME_FLAME_.1]  59.05,13.21 0 bottom
LOGO7  OSHW-LOGOMINI  [OSHW-LOGO-MINI]  96.77,9.4 0 bottom
LOGO8  SFE_LOGO_FLAME.1_INCH  [SFE_LOGO_FLAME_.1]  88.27,17.91 0 top
LOGO9  SFE_LOGO_NAME_FLAME.1_INCH  [SFE_LOGO_NAME_FLAME_.1]  90.04,13.21 0 bottom
LOGO10  OSHW-LOGOMINI  [OSHW-LOGO-MINI]  127.76,9.4 0 bottom
LOGO11  SFE_LOGO_FLAME.1_INCH  [SFE_LOGO_FLAME_.1]  119.25,17.91 0 top
LOGO12  SFE_LOGO_NAME_FLAME.1_INCH  [SFE_LOGO_NAME_FLAME_.1]  121.03,13.21 0 bottom
LOGO13  OSHW-LOGOMINI  [OSHW-LOGO-MINI]  158.75,9.4 0 bottom
LOGO14  SFE_LOGO_FLAME.1_INCH  [SFE_LOGO_FLAME_.1]  150.24,17.91 0 top
LOGO15  SFE_LOGO_NAME_FLAME.1_INCH  [SFE_LOGO_NAME_FLAME_.1]  152.02,13.21 0 bottom
LOGO16  OSHW-LOGOMINI  [OSHW-LOGO-MINI]  189.74,9.4 0 bottom
LOGO17  SFE_LOGO_FLAME.1_INCH  [SFE_LOGO_FLAME_.1]  181.23,17.91 0 top
LOGO18  SFE_LOGO_NAME_FLAME.1_INCH  [SFE_LOGO_NAME_FLAME_.1]  183.01,13.21 0 bottom
LOGO19  OSHW-LOGOMINI  [OSHW-LOGO-MINI]  220.73,9.4 0 bottom
LOGO20  SFE_LOGO_FLAME.1_INCH  [SFE_LOGO_FLAME_.1]  212.22,17.91 0 top
LOGO21  SFE_LOGO_NAME_FLAME.1_INCH  [SFE_LOGO_NAME_FLAME_.1]  214,13.21 0 bottom
LOGO22  OSHW-LOGOMINI  [OSHW-LOGO-MINI]  251.71,9.4 0 bottom
LOGO23  SFE_LOGO_FLAME.1_INCH  [SFE_LOGO_FLAME_.1]  243.21,17.91 0 top
LOGO24  SFE_LOGO_NAME_FLAME.1_INCH  [SFE_LOGO_NAME_FLAME_.1]  244.98,13.21 0 bottom
LOGO25  OSHW-LOGOMINI  [OSHW-LOGO-MINI]  34.8,35.31 0 bottom
LOGO26  SFE_LOGO_FLAME.1_INCH  [SFE_LOGO_FLAME_.1]  26.29,43.81 0 top
LOGO27  SFE_LOGO_NAME_FLAME.1_INCH  [SFE_LOGO_NAME_FLAME_.1]  28.07,39.12 0 bottom
LOGO28  OSHW-LOGOMINI  [OSHW-LOGO-MINI]  65.79,35.31 0 bottom
LOGO29  SFE_LOGO_FLAME.1_INCH  [SFE_LOGO_FLAME_.1]  57.28,43.81 0 top
LOGO30  SFE_LOGO_NAME_FLAME.1_INCH  [SFE_LOGO_NAME_FLAME_.1]  59.05,39.12 0 bottom
LOGO31  OSHW-LOGOMINI  [OSHW-LOGO-MINI]  96.77,35.31 0 bottom
LOGO32  SFE_LOGO_FLAME.1_INCH  [SFE_LOGO_FLAME_.1]  88.27,43.81 0 top
LOGO33  SFE_LOGO_NAME_FLAME.1_INCH  [SFE_LOGO_NAME_FLAME_.1]  90.04,39.12 0 bottom
LOGO34  OSHW-LOGOMINI  [OSHW-LOGO-MINI]  127.76,35.31 0 bottom
LOGO35  SFE_LOGO_FLAME.1_INCH  [SFE_LOGO_FLAME_.1]  119.25,43.81 0 top
LOGO36  SFE_LOGO_NAME_FLAME.1_INCH  [SFE_LOGO_NAME_FLAME_.1]  121.03,39.12 0 bottom
LOGO37  OSHW-LOGOMINI  [OSHW-LOGO-MINI]  158.75,35.31 0 bottom
LOGO38  SFE_LOGO_FLAME.1_INCH  [SFE_LOGO_FLAME_.1]  150.24,43.81 0 top
LOGO39  SFE_LOGO_NAME_FLAME.1_INCH  [SFE_LOGO_NAME_FLAME_.1]  152.02,39.12 0 bottom
LOGO40  OSHW-LOGOMINI  [OSHW-LOGO-MINI]  189.74,35.31 0 bottom
LOGO41  SFE_LOGO_FLAME.1_INCH  [SFE_LOGO_FLAME_.1]  181.23,43.81 0 top
LOGO42  SFE_LOGO_NAME_FLAME.1_INCH  [SFE_LOGO_NAME_FLAME_.1]  183.01,39.12 0 bottom
LOGO43  OSHW-LOGOMINI  [OSHW-LOGO-MINI]  220.73,35.31 0 bottom
LOGO44  SFE_LOGO_FLAME.1_INCH  [SFE_LOGO_FLAME_.1]  212.22,43.81 0 top
LOGO45  SFE_LOGO_NAME_FLAME.1_INCH  [SFE_LOGO_NAME_FLAME_.1]  214,39.12 0 bottom
LOGO46  OSHW-LOGOMINI  [OSHW-LOGO-MINI]  251.71,35.31 0 bottom
LOGO47  SFE_LOGO_FLAME.1_INCH  [SFE_LOGO_FLAME_.1]  243.21,43.81 0 top
LOGO48  SFE_LOGO_NAME_FLAME.1_INCH  [SFE_LOGO_NAME_FLAME_.1]  244.98,39.12 0 bottom
LOGO49  OSHW-LOGOMINI  [OSHW-LOGO-MINI]  34.8,61.21 0 bottom
LOGO50  SFE_LOGO_FLAME.1_INCH  [SFE_LOGO_FLAME_.1]  26.29,69.72 0 top
LOGO51  SFE_LOGO_NAME_FLAME.1_INCH  [SFE_LOGO_NAME_FLAME_.1]  28.07,65.02 0 bottom
LOGO52  OSHW-LOGOMINI  [OSHW-LOGO-MINI]  65.79,61.21 0 bottom
LOGO53  SFE_LOGO_FLAME.1_INCH  [SFE_LOGO_FLAME_.1]  57.28,69.72 0 top
LOGO54  SFE_LOGO_NAME_FLAME.1_INCH  [SFE_LOGO_NAME_FLAME_.1]  59.05,65.02 0 bottom
LOGO55  OSHW-LOGOMINI  [OSHW-LOGO-MINI]  96.77,61.21 0 bottom
LOGO56  SFE_LOGO_FLAME.1_INCH  [SFE_LOGO_FLAME_.1]  88.27,69.72 0 top
LOGO57  SFE_LOGO_NAME_FLAME.1_INCH  [SFE_LOGO_NAME_FLAME_.1]  90.04,65.02 0 bottom
LOGO58  OSHW-LOGOMINI  [OSHW-LOGO-MINI]  127.76,61.21 0 bottom
LOGO59  SFE_LOGO_FLAME.1_INCH  [SFE_LOGO_FLAME_.1]  119.25,69.72 0 top
LOGO60  SFE_LOGO_NAME_FLAME.1_INCH  [SFE_LOGO_NAME_FLAME_.1]  121.03,65.02 0 bottom
LOGO61  OSHW-LOGOMINI  [OSHW-LOGO-MINI]  158.75,61.21 0 bottom
LOGO62  SFE_LOGO_FLAME.1_INCH  [SFE_LOGO_FLAME_.1]  150.24,69.72 0 top
LOGO63  SFE_LOGO_NAME_FLAME.1_INCH  [SFE_LOGO_NAME_FLAME_.1]  152.02,65.02 0 bottom
LOGO64  OSHW-LOGOMINI  [OSHW-LOGO-MINI]  189.74,61.21 0 bottom
LOGO65  SFE_LOGO_FLAME.1_INCH  [SFE_LOGO_FLAME_.1]  181.23,69.72 0 top
LOGO66  SFE_LOGO_NAME_FLAME.1_INCH  [SFE_LOGO_NAME_FLAME_.1]  183.01,65.02 0 bottom
LOGO67  OSHW-LOGOMINI  [OSHW-LOGO-MINI]  220.73,61.21 0 bottom
LOGO68  SFE_LOGO_FLAME.1_INCH  [SFE_LOGO_FLAME_.1]  212.22,69.72 0 top
LOGO69  SFE_LOGO_NAME_FLAME.1_INCH  [SFE_LOGO_NAME_FLAME_.1]  214,65.02 0 bottom
LOGO70  OSHW-LOGOMINI  [OSHW-LOGO-MINI]  251.71,61.21 0 bottom
LOGO71  SFE_LOGO_FLAME.1_INCH  [SFE_LOGO_FLAME_.1]  243.21,69.72 0 top
LOGO72  SFE_LOGO_NAME_FLAME.1_INCH  [SFE_LOGO_NAME_FLAME_.1]  244.98,65.02 0 bottom
LOGO73  OSHW-LOGOMINI  [OSHW-LOGO-MINI]  34.8,87.12 0 bottom
LOGO74  SFE_LOGO_FLAME.1_INCH  [SFE_LOGO_FLAME_.1]  26.29,95.63 0 top
LOGO75  SFE_LOGO_NAME_FLAME.1_INCH  [SFE_LOGO_NAME_FLAME_.1]  28.07,90.93 0 bottom
LOGO76  OSHW-LOGOMINI  [OSHW-LOGO-MINI]  65.79,87.12 0 bottom
LOGO77  SFE_LOGO_FLAME.1_INCH  [SFE_LOGO_FLAME_.1]  57.28,95.63 0 top
LOGO78  SFE_LOGO_NAME_FLAME.1_INCH  [SFE_LOGO_NAME_FLAME_.1]  59.05,90.93 0 bottom
LOGO79  OSHW-LOGOMINI  [OSHW-LOGO-MINI]  96.77,87.12 0 bottom
LOGO80  SFE_LOGO_FLAME.1_INCH  [SFE_LOGO_FLAME_.1]  88.27,95.63 0 top
LOGO81  SFE_LOGO_NAME_FLAME.1_INCH  [SFE_LOGO_NAME_FLAME_.1]  90.04,90.93 0 bottom
LOGO82  OSHW-LOGOMINI  [OSHW-LOGO-MINI]  127.76,87.12 0 bottom
LOGO83  SFE_LOGO_FLAME.1_INCH  [SFE_LOGO_FLAME_.1]  119.25,95.63 0 top
LOGO84  SFE_LOGO_NAME_FLAME.1_INCH  [SFE_LOGO_NAME_FLAME_.1]  121.03,90.93 0 bottom
LOGO85  OSHW-LOGOMINI  [OSHW-LOGO-MINI]  158.75,87.12 0 bottom
LOGO86  SFE_LOGO_FLAME.1_INCH  [SFE_LOGO_FLAME_.1]  150.24,95.63 0 top
LOGO87  SFE_LOGO_NAME_FLAME.1_INCH  [SFE_LOGO_NAME_FLAME_.1]  152.02,90.93 0 bottom
LOGO88  OSHW-LOGOMINI  [OSHW-LOGO-MINI]  189.74,87.12 0 bottom
LOGO89  SFE_LOGO_FLAME.1_INCH  [SFE_LOGO_FLAME_.1]  181.23,95.63 0 top
LOGO90  SFE_LOGO_NAME_FLAME.1_INCH  [SFE_LOGO_NAME_FLAME_.1]  183.01,90.93 0 bottom
LOGO91  OSHW-LOGOMINI  [OSHW-LOGO-MINI]  220.73,87.12 0 bottom
LOGO92  SFE_LOGO_FLAME.1_INCH  [SFE_LOGO_FLAME_.1]  212.22,95.63 0 top
LOGO93  SFE_LOGO_NAME_FLAME.1_INCH  [SFE_LOGO_NAME_FLAME_.1]  214,90.93 0 bottom
LOGO94  OSHW-LOGOMINI  [OSHW-LOGO-MINI]  251.71,87.12 0 bottom
LOGO95  SFE_LOGO_FLAME.1_INCH  [SFE_LOGO_FLAME_.1]  243.21,95.63 0 top
LOGO96  SFE_LOGO_NAME_FLAME.1_INCH  [SFE_LOGO_NAME_FLAME_.1]  244.98,90.93 0 bottom
LOGO97  OSHW-LOGOMINI  [OSHW-LOGO-MINI]  34.8,113.03 0 bottom
LOGO98  SFE_LOGO_FLAME.1_INCH  [SFE_LOGO_FLAME_.1]  26.29,121.54 0 top
LOGO99  SFE_LOGO_NAME_FLAME.1_INCH  [SFE_LOGO_NAME_FLAME_.1]  28.07,116.84 0 bottom
LOGO100  OSHW-LOGOMINI  [OSHW-LOGO-MINI]  65.79,113.03 0 bottom
LOGO101  SFE_LOGO_FLAME.1_INCH  [SFE_LOGO_FLAME_.1]  57.28,121.54 0 top
LOGO102  SFE_LOGO_NAME_FLAME.1_INCH  [SFE_LOGO_NAME_FLAME_.1]  59.05,116.84 0 bottom
LOGO103  OSHW-LOGOMINI  [OSHW-LOGO-MINI]  96.77,113.03 0 bottom
LOGO104  SFE_LOGO_FLAME.1_INCH  [SFE_LOGO_FLAME_.1]  88.27,121.54 0 top
LOGO105  SFE_LOGO_NAME_FLAME.1_INCH  [SFE_LOGO_NAME_FLAME_.1]  90.04,116.84 0 bottom
LOGO106  OSHW-LOGOMINI  [OSHW-LOGO-MINI]  127.76,113.03 0 bottom
LOGO107  SFE_LOGO_FLAME.1_INCH  [SFE_LOGO_FLAME_.1]  119.25,121.54 0 top
LOGO108  SFE_LOGO_NAME_FLAME.1_INCH  [SFE_LOGO_NAME_FLAME_.1]  121.03,116.84 0 bottom
LOGO109  OSHW-LOGOMINI  [OSHW-LOGO-MINI]  158.75,113.03 0 bottom
LOGO110  SFE_LOGO_FLAME.1_INCH  [SFE_LOGO_FLAME_.1]  150.24,121.54 0 top
LOGO111  SFE_LOGO_NAME_FLAME.1_INCH  [SFE_LOGO_NAME_FLAME_.1]  152.02,116.84 0 bottom
LOGO112  OSHW-LOGOMINI  [OSHW-LOGO-MINI]  189.74,113.03 0 bottom
LOGO113  SFE_LOGO_FLAME.1_INCH  [SFE_LOGO_FLAME_.1]  181.23,121.54 0 top
LOGO114  SFE_LOGO_NAME_FLAME.1_INCH  [SFE_LOGO_NAME_FLAME_.1]  183.01,116.84 0 bottom
LOGO115  OSHW-LOGOMINI  [OSHW-LOGO-MINI]  220.73,113.03 0 bottom
LOGO116  SFE_LOGO_FLAME.1_INCH  [SFE_LOGO_FLAME_.1]  212.22,121.54 0 top
LOGO117  SFE_LOGO_NAME_FLAME.1_INCH  [SFE_LOGO_NAME_FLAME_.1]  214,116.84 0 bottom
LOGO118  OSHW-LOGOMINI  [OSHW-LOGO-MINI]  251.71,113.03 0 bottom
LOGO119  SFE_LOGO_FLAME.1_INCH  [SFE_LOGO_FLAME_.1]  243.21,121.54 0 top
LOGO120  SFE_LOGO_NAME_FLAME.1_INCH  [SFE_LOGO_NAME_FLAME_.1]  244.98,116.84 0 bottom
R1  10k  [0603]  22.99,14.48 270 top
R2  1k  [0603]  35.94,25.15 270 top
R3  10k  [0603]  28.7,14.48 270 top
R4  10k  [0603]  53.97,14.48 270 top
R5  10k  [0603]  59.69,14.48 270 top
R6  10k  [0603]  17.02,19.56 90 top
R7  10k  [0603]  17.27,14.48 90 top
R8  10k  [0603]  15.37,14.48 90 top
R9  4.7k  [0603]  26.8,14.48 270 top
R10  4.7k  [0603]  24.89,14.48 270 top
R11  10k  [0603]  48.01,19.56 90 top
R12  2.2k  [0603]  33.53,14.48 0 top
R13  2.2k  [0603]  33.53,9.4 0 top
R14  10k  [0603]  48.26,14.48 90 top
R15  10k  [0603]  46.35,14.48 90 top
R16  4.7k  [0603]  57.78,14.48 270 top
R17  4.7k  [0603]  55.88,14.48 270 top
R18  2.2k  [0603]  64.52,14.48 0 top
R19  2.2k  [0603]  64.52,9.4 0 top
R20  1k  [0603]  66.93,25.15 270 top
R21  10k  [0603]  84.96,14.48 270 top
R22  10k  [0603]  90.68,14.48 270 top
R23  10k  [0603]  78.99,19.56 90 top
R24  10k  [0603]  79.25,14.48 90 top
R25  10k  [0603]  77.34,14.48 90 top
R26  4.7k  [0603]  88.77,14.48 270 top
R27  4.7k  [0603]  86.87,14.48 270 top
R28  2.2k  [0603]  95.5,14.48 0 top
R29  2.2k  [0603]  95.5,9.4 0 top
R30  1k  [0603]  97.92,25.15 270 top
R31  10k  [0603]  115.95,14.48 270 top